# Altium PCB copper_suicide.PcbDoc (part 1 of 6)
Units mm, origin at the board's own origin, x right, y up, seen from the top; angles counter-clockwise.
Board outline 200 x 200 mm, 10 copper layers (Top Layer, Signal Layer 1, Signal Layer 2, Signal Layer 3, Signal Layer 4, Signal Layer 5, Signal Layer 6, Signal Layer 7, Signal Layer 8, Bottom Layer), stack 1.555 mm thick; 36 components, 3934 nets, 1640 pads, 0 vias.
Unrouted connection lines stored in the file: 671.
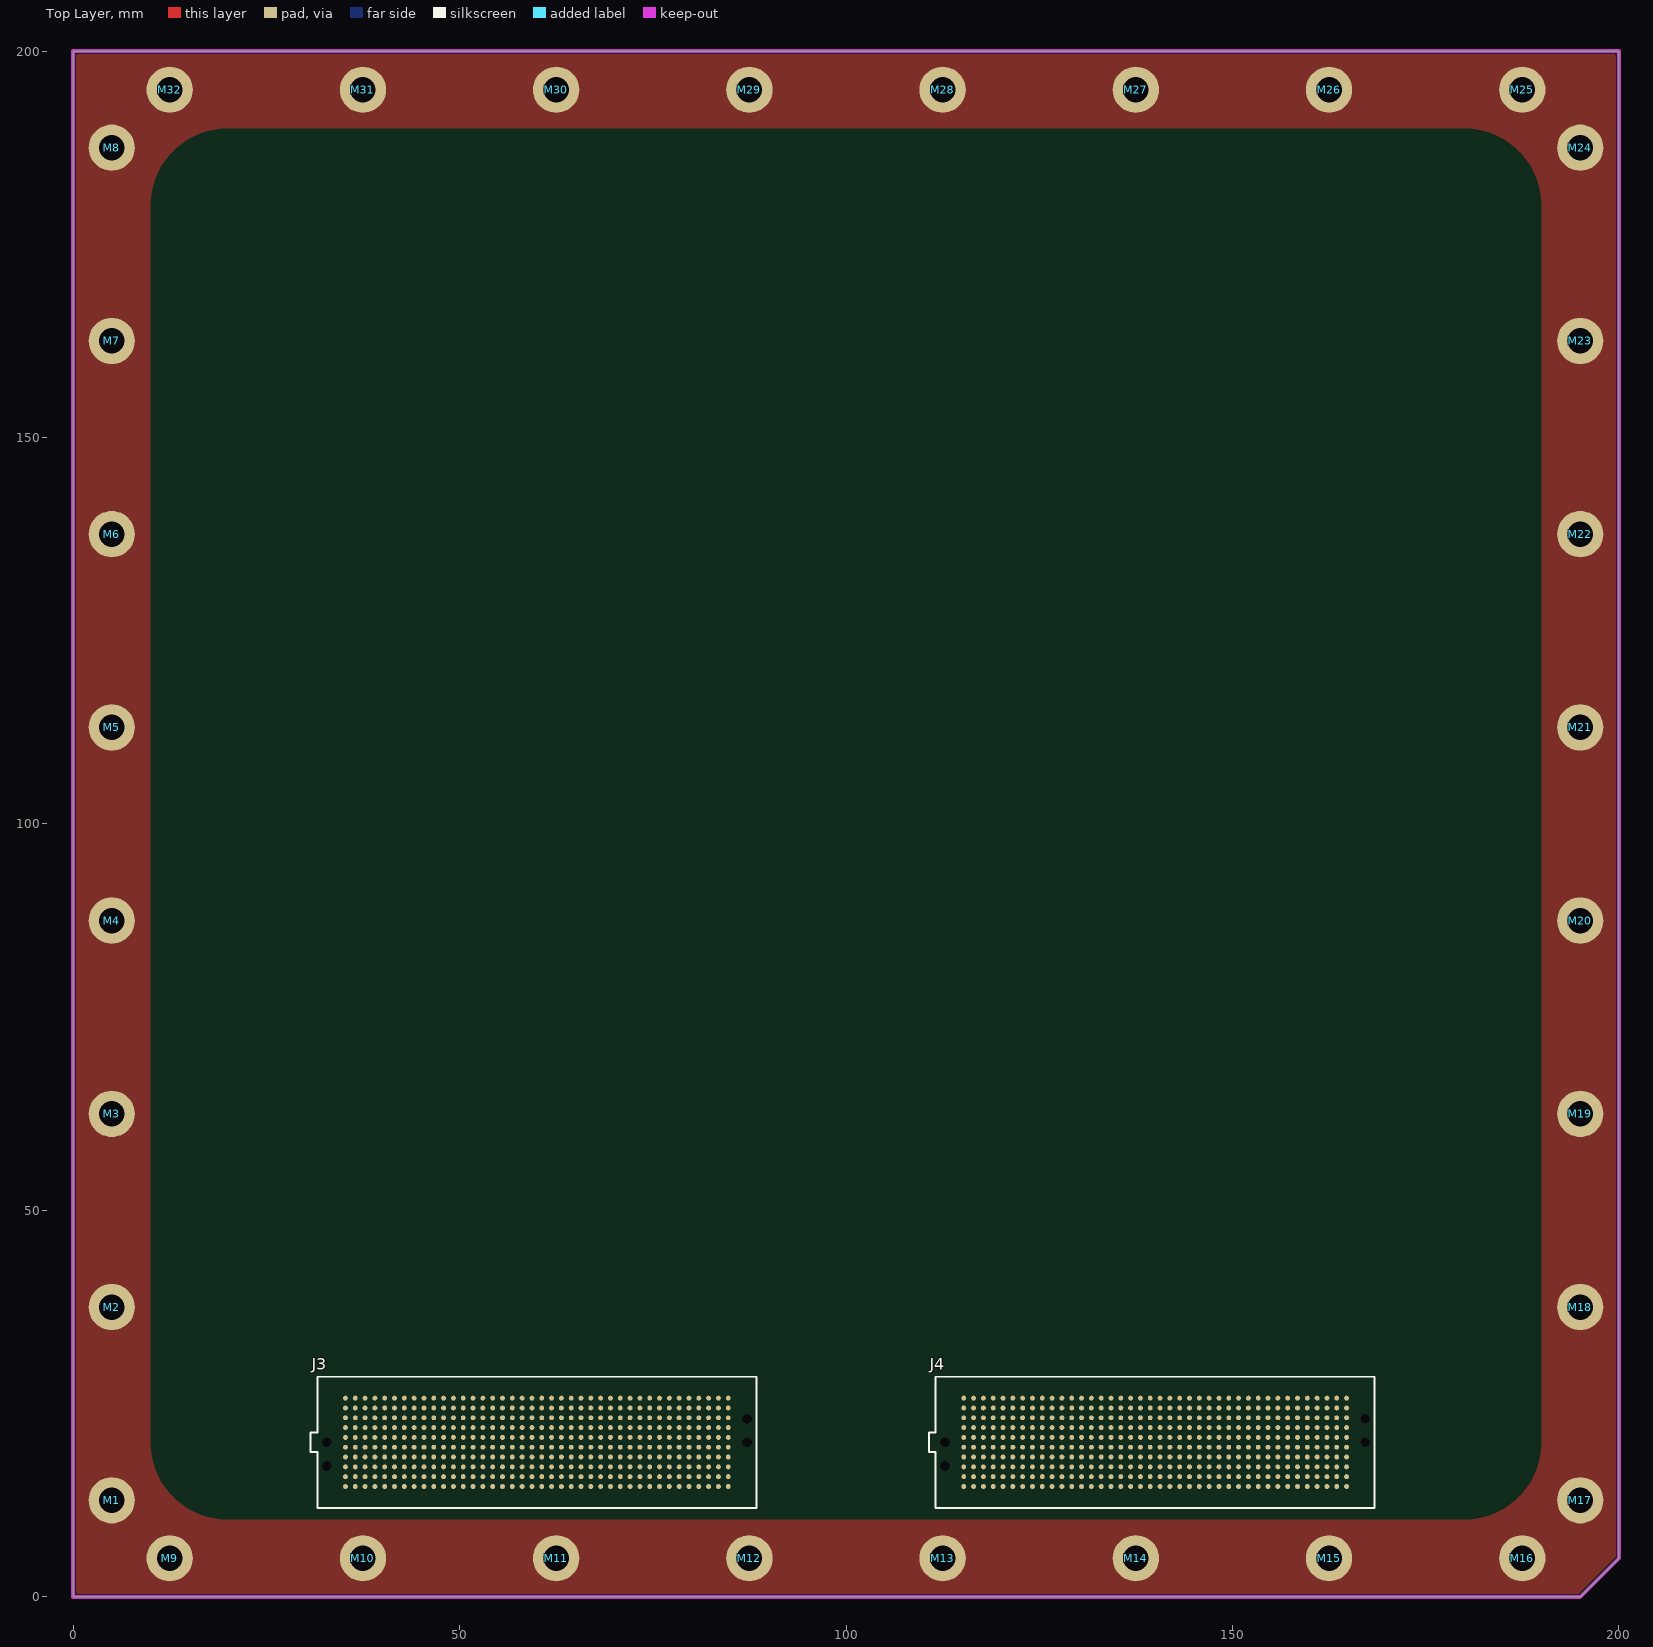
[diagram p0: Top Layer view]
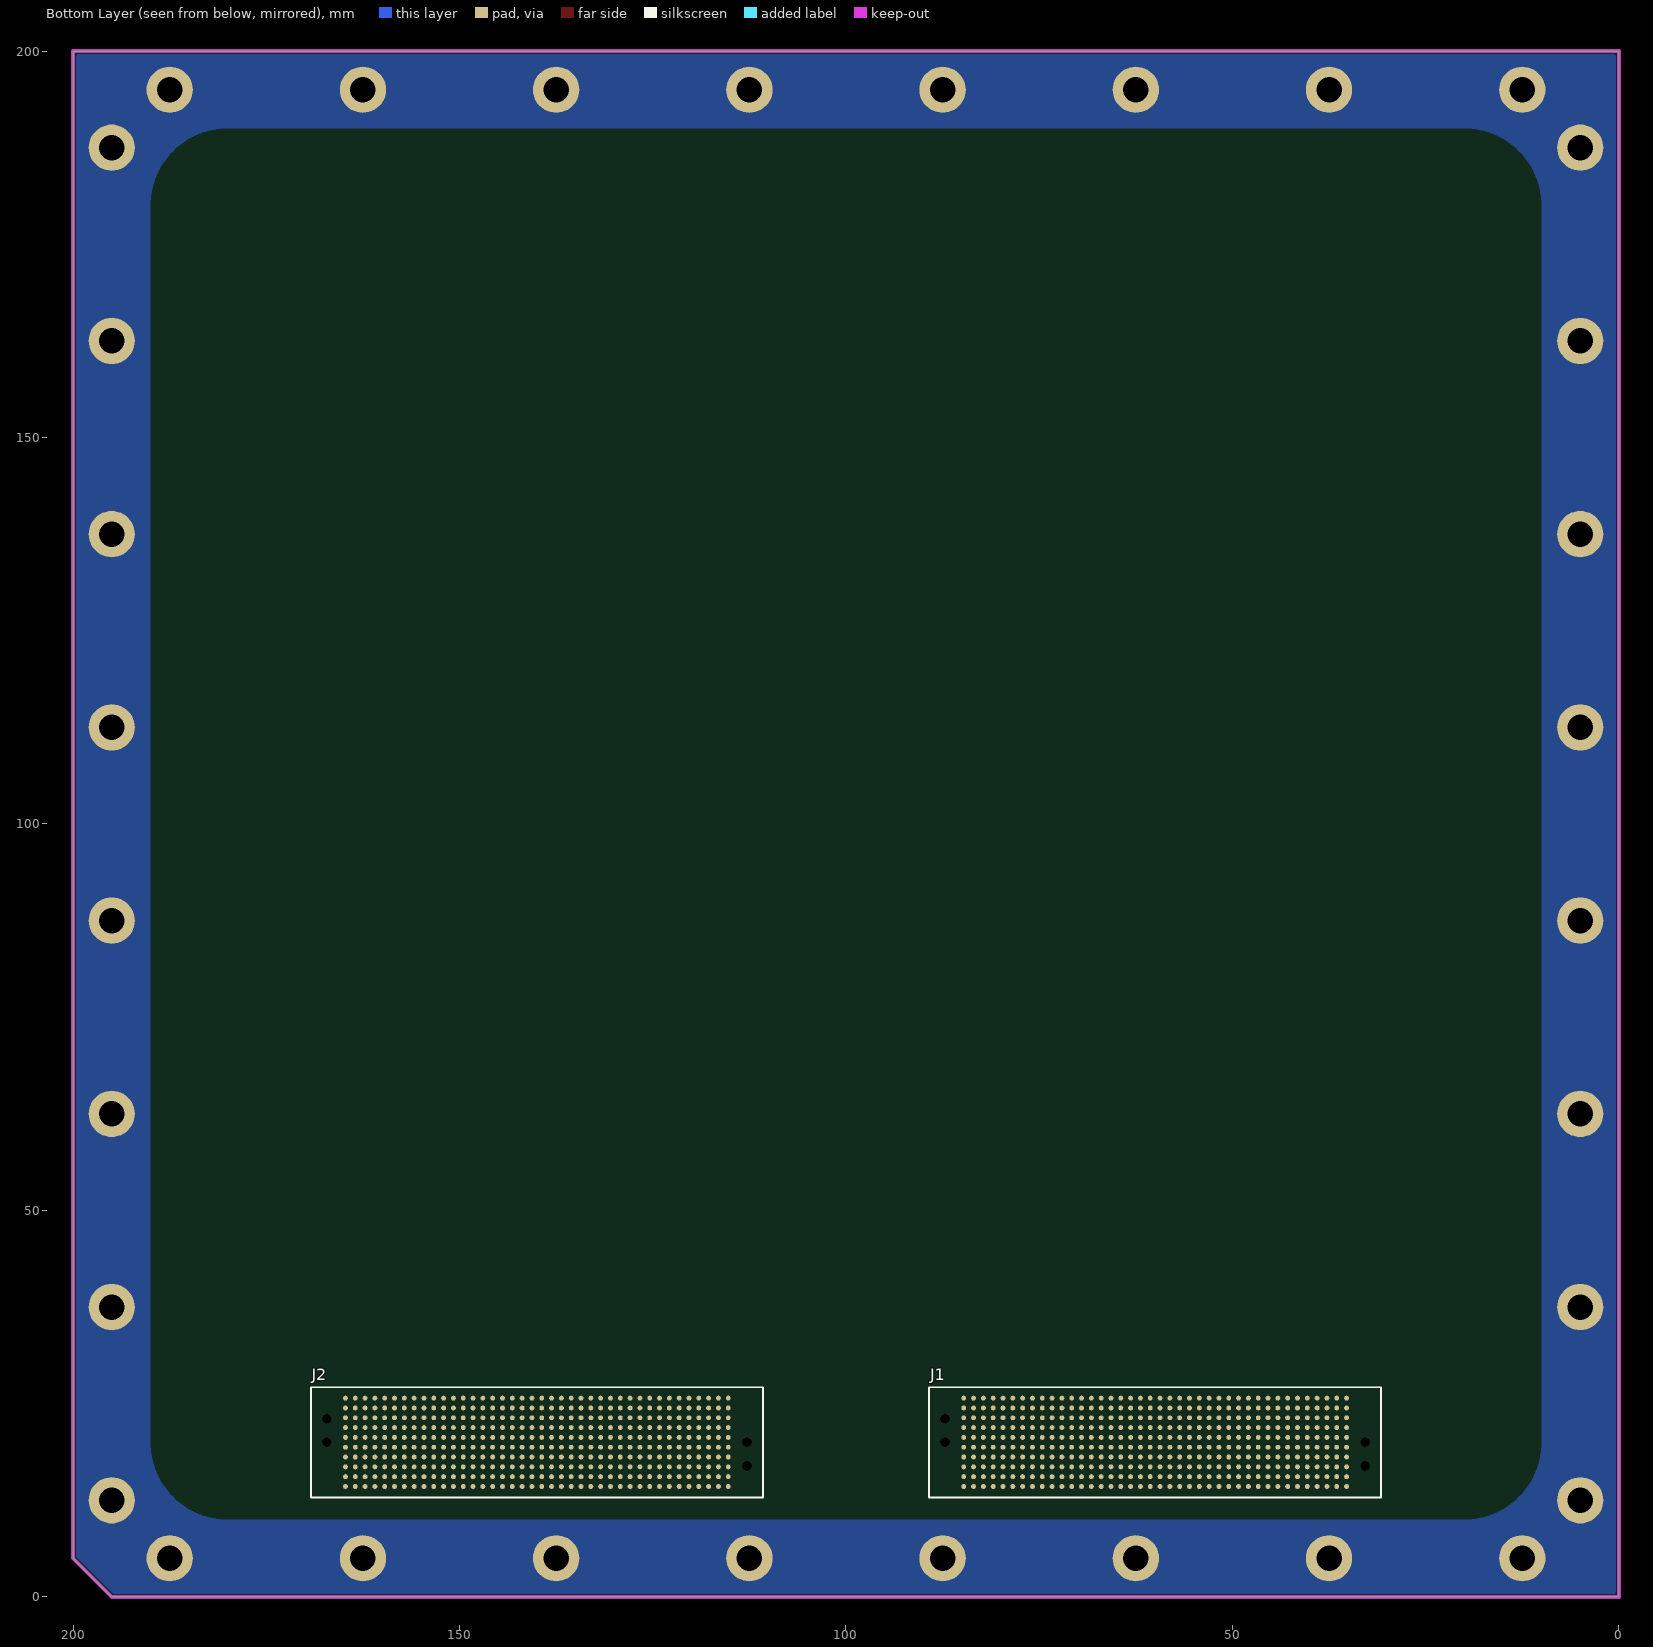
[diagram p1: Bottom Layer view, seen from below]

## Layer stack, top to bottom
Top Solder: solder mask 0.0102, Solder Resist, Dk 3.5
Top Layer: signal copper 0.036
Dielectric1: core 0.1448, FR408, Dk 3.67
Signal Layer 1: signal copper 0.018
Dielectric 3: prepreg 0.1448, FR408, Dk 3.67
Signal Layer 2: signal copper 0.018
Dielectric 4: core 0.1448, FR408, Dk 3.67
Signal Layer 3: signal copper 0.018
Dielectric 5: prepreg 0.1448, FR408, Dk 3.67
Signal Layer 4: signal copper 0.036
Dielectric 6: core 0.1448, FR408, Dk 3.67
Signal Layer 5: signal copper 0.036
Dielectric 7: prepreg 0.1448, FR408, Dk 3.67
Signal Layer 6: signal copper 0.018
Dielectric 8: core 0.1448, FR408, Dk 3.67
Signal Layer 7: signal copper 0.018
Dielectric 9: prepreg 0.1448, FR408, Dk 3.67
Signal Layer 8: signal copper 0.018
Dielectric 2: core 0.1448, FR408, Dk 3.67
Bottom Layer: signal copper 0.036
Bottom Solder: solder mask 0.0102, Solder Resist, Dk 3.5

## Board outline
0,0 195,0 200,5 200,200 0,200

## Design rules (kind name [scope] priority, off if disabled: settings)
Clearance [All] p1: gap=0.127
ComponentClearance [All] p1 off: gap=0.254 collisioncheckmode=3 verticalgap=0.254 showdistances=FALSE
DiffPairsRouting [All] p1: maxlimit=0.254 minlimit=0.254 mostfreqgap=0.254 toplayer_minwidth=0.381 toplayer_maxwidth=0.381 toplayer_prefwidth=0.381 midlayer1_minwidth=0.381 midlayer1_maxwidth=0.381 midlayer1_prefwidth=0.381 midlayer2_minwidth=0.381 midlayer2_maxwidth=0.381 midlayer2_prefwidth=0.381 midlayer3_minwidth=0.381 midlayer3_maxwidth=0.381 midlayer3_prefwidth=0.381 midlayer4_minwidth=0.381 midlayer4_maxwidth=0.381 midlayer4_prefwidth=0.381 midlayer5_minwidth=0.381 midlayer5_maxwidth=0.381 midlayer5_prefwidth=0.381 midlayer6_minwidth=0.381 midlayer6_maxwidth=0.381 midlayer6_prefwidth=0.381 midlayer7_minwidth=0.381 midlayer7_maxwidth=0.381 midlayer7_prefwidth=0.381 midlayer8_minwidth=0.381 midlayer8_maxwidth=0.381 midlayer8_prefwidth=0.381 bottomlayer_minwidth=0.381 bottomlayer_maxwidth=0.381 bottomlayer_prefwidth=0.381 maxuncoupledlength=12.7
HoleSize [All] p1: absolutevalues=TRUE maxlimit=25.4 minlimit=0.254 maxpercent=80.000 minpercent=20.000
Length "Schematic Length Constraint" [InNet('NetR14_1')] p1: maxlimit=50.8 minlimit=0
PolygonConnect [All] p1: connectstyle=Direct reliefconductorwidth=0.254 reliefentries=4 polygonreliefangle="90 Angle" airgapwidth=0.254
RoutingVias [All] p1: holewidth=0.711 width=1.27 viastyle="Through Hole" minholewidth=0.711 minwidth=1.27 maxholewidth=0.711 maxwidth=1.27
SilkToSolderMaskClearance SilkscreenOverComponentPads [IsPad] p1: minsilkscreentomaskgap=0.254 clearancetoexposedcopper=TRUE
SolderMaskExpansion [All] p1: expansion=0.102
Width [All] p1: maxlimit=500 minlimit=0.254 preferedwidth=0.254
26 further rules are at their usual default settings.

## Classes and differential pairs
net class JTAGI_TOP: JTAGI_TOP.TCK_5 JTAGI_TOP.TDI_5 JTAGI_TOP.TDO_5 JTAGI_TOP.TMS_5
net class CLKCFG: CLKCFG.C_5_N CLKCFG.C_5_P
component class PWR-VDDR: C85 C86 L4 U11
component class BD_JTAG: P16 P17 P18 P19
component class J4A: J4
component class J3A: J3
component class J2A: J2
component class J1A: J1
component class main: M1 M2 M3 M4 M5 M6 M7 M8 M9 M10 M11 M12 M13 M14 M15 M16 M17 M18 M19 M20 M21 M22 M23 M24 M25 M26 M27 M28 M29 M30 M31 M32
component class CLK: U1
component class FPGA00: P5A P6A P7A P8A
component class FPGA01: P5B P6B P7B P8B
component class FPGA02: P5C P6C P7C P8C
component class FPGA03: P5D P6D P7D P8D
component class FPGA10: P9A P10A P11A P12A
component class FPGA11: P9B P10B P11B P12B
component class FPGA12: P9C P10C P11C P12C
component class FPGA13: P9D P10D P11D P12D
component class FPGA20: P9E P10E P11E P12E
component class FPGA21: P9F P10F P11F P12F
component class FPGA22: P9G P10G P11G P12G
component class FPGA23: P9H P10H P11H P12H
component class FPGA30: P5E P6E P7E P8E
component class FPGA31: P5F P6F P7F P8F
component class FPGA32: P5G P6G P7G P8G
component class FPGA33: P5H P6H P7H P8H
net class A00: A00.CTRL.CASN_5 A00.CTRL.CKE_5 A00.CTRL.CLK_5_N A00.CTRL.CLK_5_P A00.CTRL.CSN_5 A00.CTRL.ODT_5 A00.CTRL.RASN_5 A00.CTRL.RSTN_5 A00.CTRL.WEN_5 A00.DA/B.A0_5 A00.DA/B.A1_5 A00.DA/B.A2_5 A00.DA/B.A3_5 A00.DA/B.A4_5 A00.DA/B.A5_5 A00.DA/B.A6_5 A00.DA/B.A7_5 A00.DA/B.A8_5 A00.DA/B.A9_5 A00.DA/B.A10_5 A00.DA/B.A11_5 A00.DA/B.A12_5 A00.DA/B.A13_5 A00.DA/B.A14_5 A00.DA/B.A15_5 A00.DA/B.B0_5 A00.DA/B.B1_5 A00.DA/B.B2_5
net class A01: A01.CTRL.CASN_5 A01.CTRL.CKE_5 A01.CTRL.CLK_5_N A01.CTRL.CLK_5_P A01.CTRL.CSN_5 A01.CTRL.ODT_5 A01.CTRL.RASN_5 A01.CTRL.RSTN_5 A01.CTRL.WEN_5 A01.DA/B.A0_5 A01.DA/B.A1_5 A01.DA/B.A2_5 A01.DA/B.A3_5 A01.DA/B.A4_5 A01.DA/B.A5_5 A01.DA/B.A6_5 A01.DA/B.A7_5 A01.DA/B.A8_5 A01.DA/B.A9_5 A01.DA/B.A10_5 A01.DA/B.A11_5 A01.DA/B.A12_5 A01.DA/B.A13_5 A01.DA/B.A14_5 A01.DA/B.A15_5 A01.DA/B.B0_5 A01.DA/B.B1_5 A01.DA/B.B2_5
net class A02: A02.CTRL.CASN_5 A02.CTRL.CKE_5 A02.CTRL.CLK_5_N A02.CTRL.CLK_5_P A02.CTRL.CSN_5 A02.CTRL.ODT_5 A02.CTRL.RASN_5 A02.CTRL.RSTN_5 A02.CTRL.WEN_5 A02.DA/B.A0_5 A02.DA/B.A1_5 A02.DA/B.A2_5 A02.DA/B.A3_5 A02.DA/B.A4_5 A02.DA/B.A5_5 A02.DA/B.A6_5 A02.DA/B.A7_5 A02.DA/B.A8_5 A02.DA/B.A9_5 A02.DA/B.A10_5 A02.DA/B.A11_5 A02.DA/B.A12_5 A02.DA/B.A13_5 A02.DA/B.A14_5 A02.DA/B.A15_5 A02.DA/B.B0_5 A02.DA/B.B1_5 A02.DA/B.B2_5
net class A03: A03.CTRL.CASN_5 A03.CTRL.CKE_5 A03.CTRL.CLK_5_N A03.CTRL.CLK_5_P A03.CTRL.CSN_5 A03.CTRL.ODT_5 A03.CTRL.RASN_5 A03.CTRL.RSTN_5 A03.CTRL.WEN_5 A03.DA/B.A0_5 A03.DA/B.A1_5 A03.DA/B.A2_5 A03.DA/B.A3_5 A03.DA/B.A4_5 A03.DA/B.A5_5 A03.DA/B.A6_5 A03.DA/B.A7_5 A03.DA/B.A8_5 A03.DA/B.A9_5 A03.DA/B.A10_5 A03.DA/B.A11_5 A03.DA/B.A12_5 A03.DA/B.A13_5 A03.DA/B.A14_5 A03.DA/B.A15_5 A03.DA/B.B0_5 A03.DA/B.B1_5 A03.DA/B.B2_5
net class A30: A30.CTRL.CASN_5 A30.CTRL.CKE_5 A30.CTRL.CLK_5_N A30.CTRL.CLK_5_P A30.CTRL.CSN_5 A30.CTRL.ODT_5 A30.CTRL.RASN_5 A30.CTRL.RSTN_5 A30.CTRL.WEN_5 A30.DA/B.A0_5 A30.DA/B.A1_5 A30.DA/B.A2_5 A30.DA/B.A3_5 A30.DA/B.A4_5 A30.DA/B.A5_5 A30.DA/B.A6_5 A30.DA/B.A7_5 A30.DA/B.A8_5 A30.DA/B.A9_5 A30.DA/B.A10_5 A30.DA/B.A11_5 A30.DA/B.A12_5 A30.DA/B.A13_5 A30.DA/B.A14_5 A30.DA/B.A15_5 A30.DA/B.B0_5 A30.DA/B.B1_5 A30.DA/B.B2_5
net class A31: A31.CTRL.CASN_5 A31.CTRL.CKE_5 A31.CTRL.CLK_5_N A31.CTRL.CLK_5_P A31.CTRL.CSN_5 A31.CTRL.ODT_5 A31.CTRL.RASN_5 A31.CTRL.RSTN_5 A31.CTRL.WEN_5 A31.DA/B.A0_5 A31.DA/B.A1_5 A31.DA/B.A2_5 A31.DA/B.A3_5 A31.DA/B.A4_5 A31.DA/B.A5_5 A31.DA/B.A6_5 A31.DA/B.A7_5 A31.DA/B.A8_5 A31.DA/B.A9_5 A31.DA/B.A10_5 A31.DA/B.A11_5 A31.DA/B.A12_5 A31.DA/B.A13_5 A31.DA/B.A14_5 A31.DA/B.A15_5 A31.DA/B.B0_5 A31.DA/B.B1_5 A31.DA/B.B2_5
net class A32: A32.CTRL.CASN_5 A32.CTRL.CKE_5 A32.CTRL.CLK_5_N A32.CTRL.CLK_5_P A32.CTRL.CSN_5 A32.CTRL.ODT_5 A32.CTRL.RASN_5 A32.CTRL.RSTN_5 A32.CTRL.WEN_5 A32.DA/B.A0_5 A32.DA/B.A1_5 A32.DA/B.A2_5 A32.DA/B.A3_5 A32.DA/B.A4_5 A32.DA/B.A5_5 A32.DA/B.A6_5 A32.DA/B.A7_5 A32.DA/B.A8_5 A32.DA/B.A9_5 A32.DA/B.A10_5 A32.DA/B.A11_5 A32.DA/B.A12_5 A32.DA/B.A13_5 A32.DA/B.A14_5 A32.DA/B.A15_5 A32.DA/B.B0_5 A32.DA/B.B1_5 A32.DA/B.B2_5
net class A33: A33.CTRL.CASN_5 A33.CTRL.CKE_5 A33.CTRL.CLK_5_N A33.CTRL.CLK_5_P A33.CTRL.CSN_5 A33.CTRL.ODT_5 A33.CTRL.RASN_5 A33.CTRL.RSTN_5 A33.CTRL.WEN_5 A33.DA/B.A0_5 A33.DA/B.A1_5 A33.DA/B.A2_5 A33.DA/B.A3_5 A33.DA/B.A4_5 A33.DA/B.A5_5 A33.DA/B.A6_5 A33.DA/B.A7_5 A33.DA/B.A8_5 A33.DA/B.A9_5 A33.DA/B.A10_5 A33.DA/B.A11_5 A33.DA/B.A12_5 A33.DA/B.A13_5 A33.DA/B.A14_5 A33.DA/B.A15_5 A33.DA/B.B0_5 A33.DA/B.B1_5 A33.DA/B.B2_5
net class CFG00: CFG00.CCLK_5 CFG00.DIN_5 CFG00.DONE_5 CFG00.DOUT_5 CFG00.INITN_5 CFG00.PROGN_5
net class CFG01: CFG01.CCLK_5 CFG01.DIN_5 CFG01.DONE_5 CFG01.DOUT_5 CFG01.INITN_5 CFG01.PROGN_5
net class CFG02: CFG02.CCLK_5 CFG02.DIN_5 CFG02.DONE_5 CFG02.DOUT_5 CFG02.INITN_5 CFG02.PROGN_5
net class CFG03: CFG03.CCLK_5 CFG03.DIN_5 CFG03.DONE_5 CFG03.DOUT_5 CFG03.INITN_5 CFG03.PROGN_5
net class CFG10: CFG10.CCLK_5 CFG10.DIN_5 CFG10.DONE_5 CFG10.DOUT_5 CFG10.INITN_5 CFG10.PROGN_5
net class CFG11: CFG11.CCLK_5 CFG11.DIN_5 CFG11.DONE_5 CFG11.DOUT_5 CFG11.INITN_5 CFG11.PROGN_5
net class CFG12: CFG12.CCLK_5 CFG12.DIN_5 CFG12.DONE_5 CFG12.DOUT_5 CFG12.INITN_5 CFG12.PROGN_5
net class CFG13: CFG13.CCLK_5 CFG13.DIN_5 CFG13.DONE_5 CFG13.DOUT_5 CFG13.INITN_5 CFG13.PROGN_5
net class CFG20: CFG20.CCLK_5 CFG20.DIN_5 CFG20.DONE_5 CFG20.DOUT_5 CFG20.INITN_5 CFG20.PROGN_5
net class CFG21: CFG21.CCLK_5 CFG21.DIN_5 CFG21.DONE_5 CFG21.DOUT_5 CFG21.INITN_5 CFG21.PROGN_5
net class CFG22: CFG22.CCLK_5 CFG22.DIN_5 CFG22.DONE_5 CFG22.DOUT_5 CFG22.INITN_5 CFG22.PROGN_5
net class CFG23: CFG23.CCLK_5 CFG23.DIN_5 CFG23.DONE_5 CFG23.DOUT_5 CFG23.INITN_5 CFG23.PROGN_5
net class CFG30: CFG30.CCLK_5 CFG30.DIN_5 CFG30.DONE_5 CFG30.DOUT_5 CFG30.INITN_5 CFG30.PROGN_5
net class CFG31: CFG31.CCLK_5 CFG31.DIN_5 CFG31.DONE_5 CFG31.DOUT_5 CFG31.INITN_5 CFG31.PROGN_5
net class CFG32: CFG32.CCLK_5 CFG32.DIN_5 CFG32.DONE_5 CFG32.DOUT_5 CFG32.INITN_5 CFG32.PROGN_5
net class CFG33: CFG33.CCLK_5 CFG33.DIN_5 CFG33.DONE_5 CFG33.DOUT_5 CFG33.INITN_5 CFG33.PROGN_5
net class CLK00: CLK00.C_5_N CLK00.C_5_P
net class CLK01: CLK01.C_5_N CLK01.C_5_P
net class CLK02: CLK02.C_5_N CLK02.C_5_P
net class CLK03: CLK03.C_5_N CLK03.C_5_P
net class CLK10: CLK10.C_5_N CLK10.C_5_P
net class CLK11: CLK11.C_5_N CLK11.C_5_P
net class CLK12: CLK12.C_5_N CLK12.C_5_P
net class CLK13: CLK13.C_5_N CLK13.C_5_P
net class CLK20: CLK20.C_5_N CLK20.C_5_P
net class CLK21: CLK21.C_5_N CLK21.C_5_P
net class CLK22: CLK22.C_5_N CLK22.C_5_P
net class CLK23: CLK23.C_5_N CLK23.C_5_P
net class CLK30: CLK30.C_5_N CLK30.C_5_P
net class CLK31: CLK31.C_5_N CLK31.C_5_P
net class CLK32: CLK32.C_5_N CLK32.C_5_P
net class CLK33: CLK33.C_5_N CLK33.C_5_P
net class F00_DDR3_AC: A00.CTRL.CASN_5 A00.CTRL.CKE_5 A00.CTRL.CLK_5_N A00.CTRL.CLK_5_P A00.CTRL.CSN_5 A00.CTRL.ODT_5 A00.CTRL.RASN_5 A00.CTRL.WEN_5 A00.DA/B.A0_5 A00.DA/B.A1_5 A00.DA/B.A2_5 A00.DA/B.A3_5 A00.DA/B.A4_5 A00.DA/B.A5_5 A00.DA/B.A6_5 A00.DA/B.A7_5 A00.DA/B.A8_5 A00.DA/B.A9_5 A00.DA/B.A10_5 A00.DA/B.A11_5 A00.DA/B.A12_5 A00.DA/B.A13_5 A00.DA/B.A14_5 A00.DA/B.A15_5 A00.DA/B.B0_5 A00.DA/B.B1_5 A00.DA/B.B2_5 A01.CTRL.CASN_5 A01.CTRL.CKE_5 A01.CTRL.CLK_5_N A01.CTRL.CLK_5_P A01.CTRL.CSN_5 A01.CTRL.ODT_5 A01.CTRL.RASN_5 A01.CTRL.WEN_5 A01.DA/B.A0_5 A01.DA/B.A1_5 A01.DA/B.A2_5 A01.DA/B.A3_5 A01.DA/B.A4_5 A01.DA/B.A5_5 A01.DA/B.A6_5 A01.DA/B.A7_5 A01.DA/B.A8_5 A01.DA/B.A9_5 A01.DA/B.A10_5 A01.DA/B.A11_5 A01.DA/B.A12_5 A01.DA/B.A13_5 A01.DA/B.A14_5 A01.DA/B.A15_5 A01.DA/B.B0_5 A01.DA/B.B1_5 A01.DA/B.B2_5 A02.CTRL.CASN_5 A02.CTRL.CKE_5 A02.CTRL.CLK_5_N A02.CTRL.CLK_5_P A02.CTRL.CSN_5 A02.CTRL.ODT_5 A02.CTRL.RASN_5 A02.CTRL.WEN_5 A02.DA/B.A0_5 A02.DA/B.A1_5 A02.DA/B.A2_5 A02.DA/B.A3_5 A02.DA/B.A4_5 A02.DA/B.A5_5 A02.DA/B.A6_5 A02.DA/B.A7_5 A02.DA/B.A8_5 A02.DA/B.A9_5 A02.DA/B.A10_5 A02.DA/B.A11_5 A02.DA/B.A12_5 A02.DA/B.A13_5 A02.DA/B.A14_5 A02.DA/B.A15_5 A02.DA/B.B0_5 A02.DA/B.B1_5 A02.DA/B.B2_5 A03.CTRL.CASN_5 A03.CTRL.CKE_5 A03.CTRL.CLK_5_N A03.CTRL.CLK_5_P A03.CTRL.CSN_5 A03.CTRL.ODT_5 A03.CTRL.RASN_5 A03.CTRL.WEN_5 A03.DA/B.A0_5 A03.DA/B.A1_5 A03.DA/B.A2_5 A03.DA/B.A3_5 A03.DA/B.A4_5 A03.DA/B.A5_5 A03.DA/B.A6_5 A03.DA/B.A7_5 A03.DA/B.A8_5 A03.DA/B.A9_5 A03.DA/B.A10_5 A03.DA/B.A11_5 A03.DA/B.A12_5 A03.DA/B.A13_5 A03.DA/B.A14_5 A03.DA/B.A15_5 A03.DA/B.B0_5 A03.DA/B.B1_5 A03.DA/B.B2_5 A30.CTRL.CASN_5 A30.CTRL.CKE_5 A30.CTRL.CLK_5_N A30.CTRL.CLK_5_P A30.CTRL.CSN_5 A30.CTRL.ODT_5 A30.CTRL.RASN_5 A30.CTRL.WEN_5 A30.DA/B.A0_5 A30.DA/B.A1_5 A30.DA/B.A2_5 A30.DA/B.A3_5 A30.DA/B.A4_5 A30.DA/B.A5_5 A30.DA/B.A6_5 A30.DA/B.A7_5 A30.DA/B.A8_5 A30.DA/B.A9_5 A30.DA/B.A10_5 A30.DA/B.A11_5 A30.DA/B.A12_5 A30.DA/B.A13_5 A30.DA/B.A14_5 A30.DA/B.A15_5 A30.DA/B.B0_5 A30.DA/B.B1_5 A30.DA/B.B2_5 A31.CTRL.CASN_5 A31.CTRL.CKE_5 A31.CTRL.CLK_5_N A31.CTRL.CLK_5_P A31.CTRL.CSN_5 A31.CTRL.ODT_5 A31.CTRL.RASN_5 A31.CTRL.WEN_5 A31.DA/B.A0_5 A31.DA/B.A1_5 A31.DA/B.A2_5 A31.DA/B.A3_5 A31.DA/B.A4_5 A31.DA/B.A5_5 A31.DA/B.A6_5 A31.DA/B.A7_5 A31.DA/B.A8_5 A31.DA/B.A9_5 A31.DA/B.A10_5 A31.DA/B.A11_5 A31.DA/B.A12_5 A31.DA/B.A13_5 A31.DA/B.A14_5 A31.DA/B.A15_5 A31.DA/B.B0_5 A31.DA/B.B1_5 A31.DA/B.B2_5 A32.CTRL.CASN_5 A32.CTRL.CKE_5 A32.CTRL.CLK_5_N A32.CTRL.CLK_5_P A32.CTRL.CSN_5 A32.CTRL.ODT_5 A32.CTRL.RASN_5 A32.CTRL.WEN_5 A32.DA/B.A0_5 A32.DA/B.A1_5 A32.DA/B.A2_5 A32.DA/B.A3_5 A32.DA/B.A4_5 A32.DA/B.A5_5 A32.DA/B.A6_5 A32.DA/B.A7_5 A32.DA/B.A8_5 A32.DA/B.A9_5 A32.DA/B.A10_5 A32.DA/B.A11_5 A32.DA/B.A12_5 A32.DA/B.A13_5 A32.DA/B.A14_5 A32.DA/B.A15_5 A32.DA/B.B0_5 A32.DA/B.B1_5 A32.DA/B.B2_5 A33.CTRL.CASN_5 A33.CTRL.CKE_5 A33.CTRL.CLK_5_N A33.CTRL.CLK_5_P A33.CTRL.CSN_5 A33.CTRL.ODT_5 A33.CTRL.RASN_5 A33.CTRL.WEN_5 A33.DA/B.A0_5 A33.DA/B.A1_5 A33.DA/B.A2_5 A33.DA/B.A3_5 A33.DA/B.A4_5 A33.DA/B.A5_5 A33.DA/B.A6_5 A33.DA/B.A7_5 A33.DA/B.A8_5 A33.DA/B.A9_5 A33.DA/B.A10_5 A33.DA/B.A11_5 A33.DA/B.A12_5 A33.DA/B.A13_5 A33.DA/B.A14_5 A33.DA/B.A15_5 A33.DA/B.B0_5 A33.DA/B.B1_5 A33.DA/B.B2_5
net class F00_DDR3_CLK: A00.CTRL.CLK_5_N A00.CTRL.CLK_5_P A01.CTRL.CLK_5_N A01.CTRL.CLK_5_P A02.CTRL.CLK_5_N A02.CTRL.CLK_5_P A03.CTRL.CLK_5_N A03.CTRL.CLK_5_P A30.CTRL.CLK_5_N A30.CTRL.CLK_5_P A31.CTRL.CLK_5_N A31.CTRL.CLK_5_P A32.CTRL.CLK_5_N A32.CTRL.CLK_5_P A33.CTRL.CLK_5_N A33.CTRL.CLK_5_P
net class F00_DDR3_DQ0: L00.D0_5 L00.D1_5 L00.D2_5 L00.D3_5 L00.D4_5 L00.D5_5 L00.D6_5 L00.D7_5 L00.LDM_5 L01.D0_5 L01.D1_5 L01.D2_5 L01.D3_5 L01.D4_5 L01.D5_5 L01.D6_5 L01.D7_5 L01.LDM_5 L02.D0_5 L02.D1_5 L02.D2_5 L02.D3_5 L02.D4_5 L02.D5_5 L02.D6_5 L02.D7_5 L02.LDM_5 L03.D0_5 L03.D1_5 L03.D2_5 L03.D3_5 L03.D4_5 L03.D5_5 L03.D6_5 L03.D7_5 L03.LDM_5 L30.D0_5 L30.D1_5 L30.D2_5 L30.D3_5 L30.D4_5 L30.D5_5 L30.D6_5 L30.D7_5 L30.LDM_5 L31.D0_5 L31.D1_5 L31.D2_5 L31.D3_5 L31.D4_5 L31.D5_5 L31.D6_5 L31.D7_5 L31.LDM_5 L32.D0_5 L32.D1_5 L32.D2_5 L32.D3_5 L32.D4_5 L32.D5_5 L32.D6_5 L32.D7_5 L32.LDM_5 L33.D0_5 L33.D1_5 L33.D2_5 L33.D3_5 L33.D4_5 L33.D5_5 L33.D6_5 L33.D7_5 L33.LDM_5
net class F00_DDR3_DQ1: L00.D8_5 L00.D9_5 L00.D10_5 L00.D11_5 L00.D12_5 L00.D13_5 L00.D14_5 L00.D15_5 L00.UDM_5 L01.D8_5 L01.D9_5 L01.D10_5 L01.D11_5 L01.D12_5 L01.D13_5 L01.D14_5 L01.D15_5 L01.UDM_5 L02.D8_5 L02.D9_5 L02.D10_5 L02.D11_5 L02.D12_5 L02.D13_5 L02.D14_5 L02.D15_5 L02.UDM_5 L03.D8_5 L03.D9_5 L03.D10_5 L03.D11_5 L03.D12_5 L03.D13_5 L03.D14_5 L03.D15_5 L03.UDM_5 L30.D8_5 L30.D9_5 L30.D10_5 L30.D11_5 L30.D12_5 L30.D13_5 L30.D14_5 L30.D15_5 L30.UDM_5 L31.D8_5 L31.D9_5 L31.D10_5 L31.D11_5 L31.D12_5 L31.D13_5 L31.D14_5 L31.D15_5 L31.UDM_5 L32.D8_5 L32.D9_5 L32.D10_5 L32.D11_5 L32.D12_5 L32.D13_5 L32.D14_5 L32.D15_5 L32.UDM_5 L33.D8_5 L33.D9_5 L33.D10_5 L33.D11_5 L33.D12_5 L33.D13_5 L33.D14_5 L33.D15_5 L33.UDM_5
net class F00_DDR3_DQ2: U00.D0_5 U00.D1_5 U00.D2_5 U00.D3_5 U00.D4_5 U00.D5_5 U00.D6_5 U00.D7_5 U00.LDM_5 U01.D0_5 U01.D1_5 U01.D2_5 U01.D3_5 U01.D4_5 U01.D5_5 U01.D6_5 U01.D7_5 U01.LDM_5 U02.D0_5 U02.D1_5 U02.D2_5 U02.D3_5 U02.D4_5 U02.D5_5 U02.D6_5 U02.D7_5 U02.LDM_5 U03.D0_5 U03.D1_5 U03.D2_5 U03.D3_5 U03.D4_5 U03.D5_5 U03.D6_5 U03.D7_5 U03.LDM_5 U30.D0_5 U30.D1_5 U30.D2_5 U30.D3_5 U30.D4_5 U30.D5_5 U30.D6_5 U30.D7_5 U30.LDM_5 U31.D0_5 U31.D1_5 U31.D2_5 U31.D3_5 U31.D4_5 U31.D5_5 U31.D6_5 U31.D7_5 U31.LDM_5 U32.D0_5 U32.D1_5 U32.D2_5 U32.D3_5 U32.D4_5 U32.D5_5 U32.D6_5 U32.D7_5 U32.LDM_5 U33.D0_5 U33.D1_5 U33.D2_5 U33.D3_5 U33.D4_5 U33.D5_5 U33.D6_5 U33.D7_5 U33.LDM_5
net class F00_DDR3_DQ3: U00.D8_5 U00.D9_5 U00.D10_5 U00.D11_5 U00.D12_5 U00.D13_5 U00.D14_5 U00.D15_5 U00.UDM_5 U01.D8_5 U01.D9_5 U01.D10_5 U01.D11_5 U01.D12_5 U01.D13_5 U01.D14_5 U01.D15_5 U01.UDM_5 U02.D8_5 U02.D9_5 U02.D10_5 U02.D11_5 U02.D12_5 U02.D13_5 U02.D14_5 U02.D15_5 U02.UDM_5 U03.D8_5 U03.D9_5 U03.D10_5 U03.D11_5 U03.D12_5 U03.D13_5 U03.D14_5 U03.D15_5 U03.UDM_5 U30.D8_5 U30.D9_5 U30.D10_5 U30.D11_5 U30.D12_5 U30.D13_5 U30.D14_5 U30.D15_5 U30.UDM_5 U31.D8_5 U31.D9_5 U31.D10_5 U31.D11_5 U31.D12_5 U31.D13_5 U31.D14_5 U31.D15_5 U31.UDM_5 U32.D8_5 U32.D9_5 U32.D10_5 U32.D11_5 U32.D12_5 U32.D13_5 U32.D14_5 U32.D15_5 U32.UDM_5 U33.D8_5 U33.D9_5 U33.D10_5 U33.D11_5 U33.D12_5 U33.D13_5 U33.D14_5 U33.D15_5 U33.UDM_5
net class F00_DDR3_DQS0: L00.D0_5 L00.D1_5 L00.D2_5 L00.D3_5 L00.D4_5 L00.D5_5 L00.D6_5 L00.D7_5 L00.L_5_N L00.L_5_P L00.LDM_5 L01.D0_5 L01.D1_5 L01.D2_5 L01.D3_5 L01.D4_5 L01.D5_5 L01.D6_5 L01.D7_5 L01.L_5_N L01.L_5_P L01.LDM_5 L02.D0_5 L02.D1_5 L02.D2_5 L02.D3_5 L02.D4_5 L02.D5_5 L02.D6_5 L02.D7_5 L02.L_5_N L02.L_5_P L02.LDM_5 L03.D0_5 L03.D1_5 L03.D2_5 L03.D3_5 L03.D4_5 L03.D5_5 L03.D6_5 L03.D7_5 L03.L_5_N L03.L_5_P L03.LDM_5 L30.D0_5 L30.D1_5 L30.D2_5 L30.D3_5 L30.D4_5 L30.D5_5 L30.D6_5 L30.D7_5 L30.L_5_N L30.L_5_P L30.LDM_5 L31.D0_5 L31.D1_5 L31.D2_5 L31.D3_5 L31.D4_5 L31.D5_5 L31.D6_5 L31.D7_5 L31.L_5_N L31.L_5_P L31.LDM_5 L32.D0_5 L32.D1_5 L32.D2_5 L32.D3_5 L32.D4_5 L32.D5_5 L32.D6_5 L32.D7_5 L32.L_5_N L32.L_5_P L32.LDM_5 L33.D0_5 L33.D1_5 L33.D2_5 L33.D3_5 L33.D4_5 L33.D5_5 L33.D6_5 L33.D7_5 L33.L_5_N L33.L_5_P L33.LDM_5
net class F00_DDR3_DQS1: L00.D8_5 L00.D9_5 L00.D10_5 L00.D11_5 L00.D12_5 L00.D13_5 L00.D14_5 L00.D15_5 L00.U_5_N L00.U_5_P L00.UDM_5 L01.D8_5 L01.D9_5 L01.D10_5 L01.D11_5 L01.D12_5 L01.D13_5 L01.D14_5 L01.D15_5 L01.U_5_N L01.U_5_P L01.UDM_5 L02.D8_5 L02.D9_5 L02.D10_5 L02.D11_5 L02.D12_5 L02.D13_5 L02.D14_5 L02.D15_5 L02.U_5_N L02.U_5_P L02.UDM_5 L03.D8_5 L03.D9_5 L03.D10_5 L03.D11_5 L03.D12_5 L03.D13_5 L03.D14_5 L03.D15_5 L03.U_5_N L03.U_5_P L03.UDM_5 L30.D8_5 L30.D9_5 L30.D10_5 L30.D11_5 L30.D12_5 L30.D13_5 L30.D14_5 L30.D15_5 L30.U_5_N L30.U_5_P L30.UDM_5 L31.D8_5 L31.D9_5 L31.D10_5 L31.D11_5 L31.D12_5 L31.D13_5 L31.D14_5 L31.D15_5 L31.U_5_N L31.U_5_P L31.UDM_5 L32.D8_5 L32.D9_5 L32.D10_5 L32.D11_5 L32.D12_5 L32.D13_5 L32.D14_5 L32.D15_5 L32.U_5_N L32.U_5_P L32.UDM_5 L33.D8_5 L33.D9_5 L33.D10_5 L33.D11_5 L33.D12_5 L33.D13_5 L33.D14_5 L33.D15_5 L33.U_5_N L33.U_5_P L33.UDM_5
net class F00_DDR3_DQS2: U00.D0_5 U00.D1_5 U00.D2_5 U00.D3_5 U00.D4_5 U00.D5_5 U00.D6_5 U00.D7_5 U00.L_5_N U00.L_5_P U00.LDM_5 U01.D0_5 U01.D1_5 U01.D2_5 U01.D3_5 U01.D4_5 U01.D5_5 U01.D6_5 U01.D7_5 U01.L_5_N U01.L_5_P U01.LDM_5 U02.D0_5 U02.D1_5 U02.D2_5 U02.D3_5 U02.D4_5 U02.D5_5 U02.D6_5 U02.D7_5 U02.L_5_N U02.L_5_P U02.LDM_5 U03.D0_5 U03.D1_5 U03.D2_5 U03.D3_5 U03.D4_5 U03.D5_5 U03.D6_5 U03.D7_5 U03.L_5_N U03.L_5_P U03.LDM_5 U30.D0_5 U30.D1_5 U30.D2_5 U30.D3_5 U30.D4_5 U30.D5_5 U30.D6_5 U30.D7_5 U30.L_5_N U30.L_5_P U30.LDM_5 U31.D0_5 U31.D1_5 U31.D2_5 U31.D3_5 U31.D4_5 U31.D5_5 U31.D6_5 U31.D7_5 U31.L_5_N U31.L_5_P U31.LDM_5 U32.D0_5 U32.D1_5 U32.D2_5 U32.D3_5 U32.D4_5 U32.D5_5 U32.D6_5 U32.D7_5 U32.L_5_N U32.L_5_P U32.LDM_5 U33.D0_5 U33.D1_5 U33.D2_5 U33.D3_5 U33.D4_5 U33.D5_5 U33.D6_5 U33.D7_5 U33.L_5_N U33.L_5_P U33.LDM_5
net class F00_DDR3_DQS3: U00.D8_5 U00.D9_5 U00.D10_5 U00.D11_5 U00.D12_5 U00.D13_5 U00.D14_5 U00.D15_5 U00.U_5_N U00.U_5_P U00.UDM_5 U01.D8_5 U01.D9_5 U01.D10_5 U01.D11_5 U01.D12_5 U01.D13_5 U01.D14_5 U01.D15_5 U01.U_5_N U01.U_5_P U01.UDM_5 U02.D8_5 U02.D9_5 U02.D10_5 U02.D11_5 U02.D12_5 U02.D13_5 U02.D14_5 U02.D15_5 U02.U_5_N U02.U_5_P U02.UDM_5 U03.D8_5 U03.D9_5 U03.D10_5 U03.D11_5 U03.D12_5 U03.D13_5 U03.D14_5 U03.D15_5 U03.U_5_N U03.U_5_P U03.UDM_5 U30.D8_5 U30.D9_5 U30.D10_5 U30.D11_5 U30.D12_5 U30.D13_5 U30.D14_5 U30.D15_5 U30.U_5_N U30.U_5_P U30.UDM_5 U31.D8_5 U31.D9_5 U31.D10_5 U31.D11_5 U31.D12_5 U31.D13_5 U31.D14_5 U31.D15_5 U31.U_5_N U31.U_5_P U31.UDM_5 U32.D8_5 U32.D9_5 U32.D10_5 U32.D11_5 U32.D12_5 U32.D13_5 U32.D14_5 U32.D15_5 U32.U_5_N U32.U_5_P U32.UDM_5 U33.D8_5 U33.D9_5 U33.D10_5 U33.D11_5 U33.D12_5 U33.D13_5 U33.D14_5 U33.D15_5 U33.U_5_N U33.U_5_P U33.UDM_5
net class F00_DDR3_DQSDiff: L00.L_5_N L00.L_5_P L00.U_5_N L00.U_5_P L01.L_5_N L01.L_5_P L01.U_5_N L01.U_5_P L02.L_5_N L02.L_5_P L02.U_5_N L02.U_5_P L03.L_5_N L03.L_5_P L03.U_5_N L03.U_5_P L30.L_5_N L30.L_5_P L30.U_5_N L30.U_5_P L31.L_5_N L31.L_5_P L31.U_5_N L31.U_5_P L32.L_5_N L32.L_5_P L32.U_5_N L32.U_5_P L33.L_5_N L33.L_5_P L33.U_5_N L33.U_5_P U00.L_5_N U00.L_5_P U00.U_5_N U00.U_5_P U01.L_5_N U01.L_5_P U01.U_5_N U01.U_5_P U02.L_5_N U02.L_5_P U02.U_5_N U02.U_5_P U03.L_5_N U03.L_5_P U03.U_5_N U03.U_5_P U30.L_5_N U30.L_5_P U30.U_5_N U30.U_5_P U31.L_5_N U31.L_5_P U31.U_5_N U31.U_5_P U32.L_5_N U32.L_5_P U32.U_5_N U32.U_5_P U33.L_5_N U33.L_5_P U33.U_5_N U33.U_5_P
net class GIL: GIL.GIL0_5 GIL.GIL1_5 GIL.GIL2_5 GIL.GIL3_5 GIL.GIL4_5 GIL.GIL5_5 GIL.GIL6_5 GIL.GIL7_5 GIL.GIL8_5 GIL.GIL9_5 GIL.GIL10_5 GIL.GIL11_5
net class GPMCI: GPMCI.S0_5 GPMCI.S1_5 GPMCI.S2_5 GPMCI.S3_5 GPMCI.S4_5 GPMCI.S5_5 GPMCI.S6_5 GPMCI.S7_5 GPMCI.S8_5 GPMCI.S9_5 GPMCI.S10_5 GPMCI.S11_5 GPMCI.S12_5 GPMCI.S13_5 GPMCI.S14_5 GPMCI.S15_5 GPMCI.S16_5 GPMCI.S17_5 GPMCI.S18_5 GPMCI.S19_5 GPMCI.S20_5 GPMCI.S21_5 GPMCI.S22_5
net class GPMCO: GPMCO.S0_5 GPMCO.S1_5 GPMCO.S2_5 GPMCO.S3_5 GPMCO.S4_5 GPMCO.S5_5 GPMCO.S6_5 GPMCO.S7_5 GPMCO.S8_5 GPMCO.S9_5 GPMCO.S10_5 GPMCO.S11_5 GPMCO.S12_5 GPMCO.S13_5 GPMCO.S14_5 GPMCO.S15_5 GPMCO.S16_5 GPMCO.S17_5 GPMCO.S18_5 GPMCO.S19_5 GPMCO.S20_5 GPMCO.S21_5 GPMCO.S22_5
net class IL07_00-J3A: IL07_00-J3A.DDRCC.S01C_5_N IL07_00-J3A.DDRCC.S01C_5_P IL07_00-J3A.DDRCC.S2_5 IL07_00-J3A.DDRCC.S3_5 IL07_00-J3A.DDRCC.S4_5 IL07_00-J3A.DDRCC.S5_5 IL07_00-J3A.DDRCC.S6_5 IL07_00-J3A.DDRCC.S7_5 IL07_00-J3A.DDRCC.S8_5 IL07_00-J3A.DDRCC.S9_5 IL07_00-J3A.DDRCC.S10_5 IL07_00-J3A.DDRCC.S11_5 IL07_00-J3A.DDRCC.S12_5 IL07_00-J3A.DDRCC.S13_5 IL07_00-J3A.DDRCC.S14_5 IL07_00-J3A.DDRCC.S15_5 IL07_00-J3A.DDRCC.S16_5 IL07_00-J3A.DDRCC.S17_5 IL07_00-J3A.DDRCC.S18_5 IL07_00-J3A.DDRCC.S19_5 IL07_00-J3A.DDRCC.S20_5 IL07_00-J3A.DDRCC.S21_5 IL07_00-J3A.DDRCC.S22_5 IL07_00-J3A.DDRCC.S23_5 IL07_00-J3A.DDRCC.S24_5 IL07_00-J3A.DDRCC.S25_5 IL07_00-J3A.DDRCC.S26_5 IL07_00-J3A.DDRCC.S27_5 IL07_00-J3A.DDRCC.S28_5 IL07_00-J3A.DDRCC.S29_5 IL07_00-J3A.DDRCC.S30_5 IL07_00-J3A.DDRCC.S31_5 IL07_00-J3A.DDRCC.S32_5 IL07_00-J3A.DDRCC.S33_5 IL07_00-J3A.DDRCC.S34_5 IL07_00-J3A.DDRCC.S35_5 IL07_00-J3A.DDRCC.S36_5 IL07_00-J3A.DDRCC.S37_5 IL07_00-J3A.DDRCC.S38_5 IL07_00-J3A.DDRCC.S39_5 IL07_00-J3A.DDRCC.S40_5 IL07_00-J3A.DDRCC.S41_5 IL07_00-J3A.DDRCC.S42_5 IL07_00-J3A.DDRCC.S43_5 IL07_00-J3A.DDRCC.S44_5 IL07_00-J3A.DDRCC.S45_5 IL07_00-J3A.DDRCC.S46_5 IL07_00-J3A.SDRCC.GPIO8.D0_5 IL07_00-J3A.SDRCC.GPIO8.D1_5 IL07_00-J3A.SDRCC.GPIO8.D2_5 IL07_00-J3A.SDRCC.GPIO8.D3_5 IL07_00-J3A.SDRCC.GPIO8.D4_5 IL07_00-J3A.SDRCC.GPIO8.D5_5 IL07_00-J3A.SDRCC.GPIO8.D6_5 IL07_00-J3A.SDRCC.GPIO8.D7_5 IL07_00-J3A.SDRCC.GPIO15.D01C_5_N IL07_00-J3A.SDRCC.GPIO15.D01C_5_P IL07_00-J3A.SDRCC.GPIO15.D2_5 IL07_00-J3A.SDRCC.GPIO15.D3_5 IL07_00-J3A.SDRCC.GPIO15.D4_5 IL07_00-J3A.SDRCC.GPIO15.D5_5 IL07_00-J3A.SDRCC.GPIO15.D6_5 IL07_00-J3A.SDRCC.GPIO15.D7_5 IL07_00-J3A.SDRCC.GPIO15.D8_5 IL07_00-J3A.SDRCC.GPIO15.D9_5 IL07_00-J3A.SDRCC.GPIO15.D10_5 IL07_00-J3A.SDRCC.GPIO15.D11_5 IL07_00-J3A.SDRCC.GPIO15.D12_5 IL07_00-J3A.SDRCC.GPIO15.D13_5 IL07_00-J3A.SDRCC.GPIO15.D14_5
net class IL12_00-07_01: IL12_00-07_01.DDRCC.S01C_5_N IL12_00-07_01.DDRCC.S01C_5_P IL12_00-07_01.DDRCC.S2_5 IL12_00-07_01.DDRCC.S3_5 IL12_00-07_01.DDRCC.S4_5 IL12_00-07_01.DDRCC.S5_5 IL12_00-07_01.DDRCC.S6_5 IL12_00-07_01.DDRCC.S7_5 IL12_00-07_01.DDRCC.S8_5 IL12_00-07_01.DDRCC.S9_5 IL12_00-07_01.DDRCC.S10_5 IL12_00-07_01.DDRCC.S11_5 IL12_00-07_01.DDRCC.S12_5 IL12_00-07_01.DDRCC.S13_5 IL12_00-07_01.DDRCC.S14_5 IL12_00-07_01.DDRCC.S15_5 IL12_00-07_01.DDRCC.S16_5 IL12_00-07_01.DDRCC.S17_5 IL12_00-07_01.DDRCC.S18_5 IL12_00-07_01.DDRCC.S19_5 IL12_00-07_01.DDRCC.S20_5 IL12_00-07_01.DDRCC.S21_5 IL12_00-07_01.DDRCC.S22_5 IL12_00-07_01.DDRCC.S23_5 IL12_00-07_01.DDRCC.S24_5 IL12_00-07_01.DDRCC.S25_5 IL12_00-07_01.DDRCC.S26_5 IL12_00-07_01.DDRCC.S27_5 IL12_00-07_01.DDRCC.S28_5 IL12_00-07_01.DDRCC.S29_5 IL12_00-07_01.DDRCC.S30_5 IL12_00-07_01.DDRCC.S31_5 IL12_00-07_01.DDRCC.S32_5 IL12_00-07_01.DDRCC.S33_5 IL12_00-07_01.DDRCC.S34_5 IL12_00-07_01.DDRCC.S35_5 IL12_00-07_01.DDRCC.S36_5 IL12_00-07_01.DDRCC.S37_5 IL12_00-07_01.DDRCC.S38_5 IL12_00-07_01.DDRCC.S39_5 IL12_00-07_01.DDRCC.S40_5 IL12_00-07_01.DDRCC.S41_5 IL12_00-07_01.DDRCC.S42_5 IL12_00-07_01.DDRCC.S43_5 IL12_00-07_01.DDRCC.S44_5 IL12_00-07_01.DDRCC.S45_5 IL12_00-07_01.DDRCC.S46_5 IL12_00-07_01.SDRCC.GPIO8.D0_5 IL12_00-07_01.SDRCC.GPIO8.D1_5 IL12_00-07_01.SDRCC.GPIO8.D2_5 IL12_00-07_01.SDRCC.GPIO8.D3_5 IL12_00-07_01.SDRCC.GPIO8.D4_5 IL12_00-07_01.SDRCC.GPIO8.D5_5 IL12_00-07_01.SDRCC.GPIO8.D6_5 IL12_00-07_01.SDRCC.GPIO8.D7_5 IL12_00-07_01.SDRCC.GPIO15.D01C_5_N IL12_00-07_01.SDRCC.GPIO15.D01C_5_P IL12_00-07_01.SDRCC.GPIO15.D2_5 IL12_00-07_01.SDRCC.GPIO15.D3_5 IL12_00-07_01.SDRCC.GPIO15.D4_5 IL12_00-07_01.SDRCC.GPIO15.D5_5 IL12_00-07_01.SDRCC.GPIO15.D6_5 IL12_00-07_01.SDRCC.GPIO15.D7_5 IL12_00-07_01.SDRCC.GPIO15.D8_5 IL12_00-07_01.SDRCC.GPIO15.D9_5 IL12_00-07_01.SDRCC.GPIO15.D10_5 IL12_00-07_01.SDRCC.GPIO15.D11_5 IL12_00-07_01.SDRCC.GPIO15.D12_5 IL12_00-07_01.SDRCC.GPIO15.D13_5 IL12_00-07_01.SDRCC.GPIO15.D14_5
net class IL12_01-07_02: IL12_01-07_02.DDRCC.S01C_5_N IL12_01-07_02.DDRCC.S01C_5_P IL12_01-07_02.DDRCC.S2_5 IL12_01-07_02.DDRCC.S3_5 IL12_01-07_02.DDRCC.S4_5 IL12_01-07_02.DDRCC.S5_5 IL12_01-07_02.DDRCC.S6_5 IL12_01-07_02.DDRCC.S7_5 IL12_01-07_02.DDRCC.S8_5 IL12_01-07_02.DDRCC.S9_5 IL12_01-07_02.DDRCC.S10_5 IL12_01-07_02.DDRCC.S11_5 IL12_01-07_02.DDRCC.S12_5 IL12_01-07_02.DDRCC.S13_5 IL12_01-07_02.DDRCC.S14_5 IL12_01-07_02.DDRCC.S15_5 IL12_01-07_02.DDRCC.S16_5 IL12_01-07_02.DDRCC.S17_5 IL12_01-07_02.DDRCC.S18_5 IL12_01-07_02.DDRCC.S19_5 IL12_01-07_02.DDRCC.S20_5 IL12_01-07_02.DDRCC.S21_5 IL12_01-07_02.DDRCC.S22_5 IL12_01-07_02.DDRCC.S23_5 IL12_01-07_02.DDRCC.S24_5 IL12_01-07_02.DDRCC.S25_5 IL12_01-07_02.DDRCC.S26_5 IL12_01-07_02.DDRCC.S27_5 IL12_01-07_02.DDRCC.S28_5 IL12_01-07_02.DDRCC.S29_5 IL12_01-07_02.DDRCC.S30_5 IL12_01-07_02.DDRCC.S31_5 IL12_01-07_02.DDRCC.S32_5 IL12_01-07_02.DDRCC.S33_5 IL12_01-07_02.DDRCC.S34_5 IL12_01-07_02.DDRCC.S35_5 IL12_01-07_02.DDRCC.S36_5 IL12_01-07_02.DDRCC.S37_5 IL12_01-07_02.DDRCC.S38_5 IL12_01-07_02.DDRCC.S39_5 IL12_01-07_02.DDRCC.S40_5 IL12_01-07_02.DDRCC.S41_5 IL12_01-07_02.DDRCC.S42_5 IL12_01-07_02.DDRCC.S43_5 IL12_01-07_02.DDRCC.S44_5 IL12_01-07_02.DDRCC.S45_5 IL12_01-07_02.DDRCC.S46_5 IL12_01-07_02.SDRCC.GPIO8.D0_5 IL12_01-07_02.SDRCC.GPIO8.D1_5 IL12_01-07_02.SDRCC.GPIO8.D2_5 IL12_01-07_02.SDRCC.GPIO8.D3_5 IL12_01-07_02.SDRCC.GPIO8.D4_5 IL12_01-07_02.SDRCC.GPIO8.D5_5 IL12_01-07_02.SDRCC.GPIO8.D6_5 IL12_01-07_02.SDRCC.GPIO8.D7_5 IL12_01-07_02.SDRCC.GPIO15.D01C_5_N IL12_01-07_02.SDRCC.GPIO15.D01C_5_P IL12_01-07_02.SDRCC.GPIO15.D2_5 IL12_01-07_02.SDRCC.GPIO15.D3_5 IL12_01-07_02.SDRCC.GPIO15.D4_5 IL12_01-07_02.SDRCC.GPIO15.D5_5 IL12_01-07_02.SDRCC.GPIO15.D6_5 IL12_01-07_02.SDRCC.GPIO15.D7_5 IL12_01-07_02.SDRCC.GPIO15.D8_5 IL12_01-07_02.SDRCC.GPIO15.D9_5 IL12_01-07_02.SDRCC.GPIO15.D10_5 IL12_01-07_02.SDRCC.GPIO15.D11_5 IL12_01-07_02.SDRCC.GPIO15.D12_5 IL12_01-07_02.SDRCC.GPIO15.D13_5 IL12_01-07_02.SDRCC.GPIO15.D14_5
net class IL12_02-07_03: IL12_02-07_03.DDRCC.S01C_5_N IL12_02-07_03.DDRCC.S01C_5_P IL12_02-07_03.DDRCC.S2_5 IL12_02-07_03.DDRCC.S3_5 IL12_02-07_03.DDRCC.S4_5 IL12_02-07_03.DDRCC.S5_5 IL12_02-07_03.DDRCC.S6_5 IL12_02-07_03.DDRCC.S7_5 IL12_02-07_03.DDRCC.S8_5 IL12_02-07_03.DDRCC.S9_5 IL12_02-07_03.DDRCC.S10_5 IL12_02-07_03.DDRCC.S11_5 IL12_02-07_03.DDRCC.S12_5 IL12_02-07_03.DDRCC.S13_5 IL12_02-07_03.DDRCC.S14_5 IL12_02-07_03.DDRCC.S15_5 IL12_02-07_03.DDRCC.S16_5 IL12_02-07_03.DDRCC.S17_5 IL12_02-07_03.DDRCC.S18_5 IL12_02-07_03.DDRCC.S19_5 IL12_02-07_03.DDRCC.S20_5 IL12_02-07_03.DDRCC.S21_5 IL12_02-07_03.DDRCC.S22_5 IL12_02-07_03.DDRCC.S23_5 IL12_02-07_03.DDRCC.S24_5 IL12_02-07_03.DDRCC.S25_5 IL12_02-07_03.DDRCC.S26_5 IL12_02-07_03.DDRCC.S27_5 IL12_02-07_03.DDRCC.S28_5 IL12_02-07_03.DDRCC.S29_5 IL12_02-07_03.DDRCC.S30_5 IL12_02-07_03.DDRCC.S31_5 IL12_02-07_03.DDRCC.S32_5 IL12_02-07_03.DDRCC.S33_5 IL12_02-07_03.DDRCC.S34_5 IL12_02-07_03.DDRCC.S35_5 IL12_02-07_03.DDRCC.S36_5 IL12_02-07_03.DDRCC.S37_5 IL12_02-07_03.DDRCC.S38_5 IL12_02-07_03.DDRCC.S39_5 IL12_02-07_03.DDRCC.S40_5 IL12_02-07_03.DDRCC.S41_5 IL12_02-07_03.DDRCC.S42_5 IL12_02-07_03.DDRCC.S43_5 IL12_02-07_03.DDRCC.S44_5 IL12_02-07_03.DDRCC.S45_5 IL12_02-07_03.DDRCC.S46_5 IL12_02-07_03.SDRCC.GPIO8.D0_5 IL12_02-07_03.SDRCC.GPIO8.D1_5 IL12_02-07_03.SDRCC.GPIO8.D2_5 IL12_02-07_03.SDRCC.GPIO8.D3_5 IL12_02-07_03.SDRCC.GPIO8.D4_5 IL12_02-07_03.SDRCC.GPIO8.D5_5 IL12_02-07_03.SDRCC.GPIO8.D6_5 IL12_02-07_03.SDRCC.GPIO8.D7_5 IL12_02-07_03.SDRCC.GPIO15.D01C_5_N IL12_02-07_03.SDRCC.GPIO15.D01C_5_P IL12_02-07_03.SDRCC.GPIO15.D2_5 IL12_02-07_03.SDRCC.GPIO15.D3_5 IL12_02-07_03.SDRCC.GPIO15.D4_5 IL12_02-07_03.SDRCC.GPIO15.D5_5 IL12_02-07_03.SDRCC.GPIO15.D6_5 IL12_02-07_03.SDRCC.GPIO15.D7_5 IL12_02-07_03.SDRCC.GPIO15.D8_5 IL12_02-07_03.SDRCC.GPIO15.D9_5 IL12_02-07_03.SDRCC.GPIO15.D10_5 IL12_02-07_03.SDRCC.GPIO15.D11_5 IL12_02-07_03.SDRCC.GPIO15.D12_5 IL12_02-07_03.SDRCC.GPIO15.D13_5 IL12_02-07_03.SDRCC.GPIO15.D14_5
net class IL12_03-J2B: IL12_03-J2B.DDRCC.S01C_5_N IL12_03-J2B.DDRCC.S01C_5_P IL12_03-J2B.DDRCC.S2_5 IL12_03-J2B.DDRCC.S3_5 IL12_03-J2B.DDRCC.S4_5 IL12_03-J2B.DDRCC.S5_5 IL12_03-J2B.DDRCC.S6_5 IL12_03-J2B.DDRCC.S7_5 IL12_03-J2B.DDRCC.S8_5 IL12_03-J2B.DDRCC.S9_5 IL12_03-J2B.DDRCC.S10_5 IL12_03-J2B.DDRCC.S11_5 IL12_03-J2B.DDRCC.S12_5 IL12_03-J2B.DDRCC.S13_5 IL12_03-J2B.DDRCC.S14_5 IL12_03-J2B.DDRCC.S15_5 IL12_03-J2B.DDRCC.S16_5 IL12_03-J2B.DDRCC.S17_5 IL12_03-J2B.DDRCC.S18_5 IL12_03-J2B.DDRCC.S19_5 IL12_03-J2B.DDRCC.S20_5 IL12_03-J2B.DDRCC.S21_5 IL12_03-J2B.DDRCC.S22_5 IL12_03-J2B.DDRCC.S23_5 IL12_03-J2B.DDRCC.S24_5 IL12_03-J2B.DDRCC.S25_5 IL12_03-J2B.DDRCC.S26_5 IL12_03-J2B.DDRCC.S27_5 IL12_03-J2B.DDRCC.S28_5 IL12_03-J2B.DDRCC.S29_5 IL12_03-J2B.DDRCC.S30_5 IL12_03-J2B.DDRCC.S31_5 IL12_03-J2B.DDRCC.S32_5 IL12_03-J2B.DDRCC.S33_5 IL12_03-J2B.DDRCC.S34_5 IL12_03-J2B.DDRCC.S35_5 IL12_03-J2B.DDRCC.S36_5 IL12_03-J2B.DDRCC.S37_5 IL12_03-J2B.DDRCC.S38_5 IL12_03-J2B.DDRCC.S39_5 IL12_03-J2B.DDRCC.S40_5 IL12_03-J2B.DDRCC.S41_5 IL12_03-J2B.DDRCC.S42_5 IL12_03-J2B.DDRCC.S43_5 IL12_03-J2B.DDRCC.S44_5 IL12_03-J2B.DDRCC.S45_5 IL12_03-J2B.DDRCC.S46_5 IL12_03-J2B.SDRCC.GPIO8.D0_5 IL12_03-J2B.SDRCC.GPIO8.D1_5 IL12_03-J2B.SDRCC.GPIO8.D2_5 IL12_03-J2B.SDRCC.GPIO8.D3_5 IL12_03-J2B.SDRCC.GPIO8.D4_5 IL12_03-J2B.SDRCC.GPIO8.D5_5 IL12_03-J2B.SDRCC.GPIO8.D6_5 IL12_03-J2B.SDRCC.GPIO8.D7_5 IL12_03-J2B.SDRCC.GPIO15.D01C_5_N IL12_03-J2B.SDRCC.GPIO15.D01C_5_P IL12_03-J2B.SDRCC.GPIO15.D2_5 IL12_03-J2B.SDRCC.GPIO15.D3_5 IL12_03-J2B.SDRCC.GPIO15.D4_5 IL12_03-J2B.SDRCC.GPIO15.D5_5 IL12_03-J2B.SDRCC.GPIO15.D6_5 IL12_03-J2B.SDRCC.GPIO15.D7_5 IL12_03-J2B.SDRCC.GPIO15.D8_5 IL12_03-J2B.SDRCC.GPIO15.D9_5 IL12_03-J2B.SDRCC.GPIO15.D10_5 IL12_03-J2B.SDRCC.GPIO15.D11_5 IL12_03-J2B.SDRCC.GPIO15.D12_5 IL12_03-J2B.SDRCC.GPIO15.D13_5 IL12_03-J2B.SDRCC.GPIO15.D14_5
net class IL12_10-68_11: IL12_10-68_11.DDRCC.S01C_5_N IL12_10-68_11.DDRCC.S01C_5_P IL12_10-68_11.DDRCC.S2_5 IL12_10-68_11.DDRCC.S3_5 IL12_10-68_11.DDRCC.S4_5 IL12_10-68_11.DDRCC.S5_5 IL12_10-68_11.DDRCC.S6_5 IL12_10-68_11.DDRCC.S7_5 IL12_10-68_11.DDRCC.S8_5 IL12_10-68_11.DDRCC.S9_5 IL12_10-68_11.DDRCC.S10_5 IL12_10-68_11.DDRCC.S11_5 IL12_10-68_11.DDRCC.S12_5 IL12_10-68_11.DDRCC.S13_5 IL12_10-68_11.DDRCC.S14_5 IL12_10-68_11.DDRCC.S15_5 IL12_10-68_11.DDRCC.S16_5 IL12_10-68_11.DDRCC.S17_5 IL12_10-68_11.DDRCC.S18_5 IL12_10-68_11.DDRCC.S19_5 IL12_10-68_11.DDRCC.S20_5 IL12_10-68_11.DDRCC.S21_5 IL12_10-68_11.DDRCC.S22_5 IL12_10-68_11.DDRCC.S23_5 IL12_10-68_11.DDRCC.S24_5 IL12_10-68_11.DDRCC.S25_5 IL12_10-68_11.DDRCC.S26_5 IL12_10-68_11.DDRCC.S27_5 IL12_10-68_11.DDRCC.S28_5 IL12_10-68_11.DDRCC.S29_5 IL12_10-68_11.DDRCC.S30_5 IL12_10-68_11.DDRCC.S31_5 IL12_10-68_11.DDRCC.S32_5 IL12_10-68_11.DDRCC.S33_5 IL12_10-68_11.DDRCC.S34_5 IL12_10-68_11.DDRCC.S35_5 IL12_10-68_11.DDRCC.S36_5 IL12_10-68_11.DDRCC.S37_5 IL12_10-68_11.DDRCC.S38_5 IL12_10-68_11.DDRCC.S39_5 IL12_10-68_11.DDRCC.S40_5 IL12_10-68_11.DDRCC.S41_5 IL12_10-68_11.DDRCC.S42_5 IL12_10-68_11.DDRCC.S43_5 IL12_10-68_11.DDRCC.S44_5 IL12_10-68_11.DDRCC.S45_5 IL12_10-68_11.DDRCC.S46_5 IL12_10-68_11.SDRCC.GPIO8.D0_5 IL12_10-68_11.SDRCC.GPIO8.D1_5 IL12_10-68_11.SDRCC.GPIO8.D2_5 IL12_10-68_11.SDRCC.GPIO8.D3_5 IL12_10-68_11.SDRCC.GPIO8.D4_5 IL12_10-68_11.SDRCC.GPIO8.D5_5 IL12_10-68_11.SDRCC.GPIO8.D6_5 IL12_10-68_11.SDRCC.GPIO8.D7_5 IL12_10-68_11.SDRCC.GPIO15.D01C_5_N IL12_10-68_11.SDRCC.GPIO15.D01C_5_P IL12_10-68_11.SDRCC.GPIO15.D2_5 IL12_10-68_11.SDRCC.GPIO15.D3_5 IL12_10-68_11.SDRCC.GPIO15.D4_5 IL12_10-68_11.SDRCC.GPIO15.D5_5 IL12_10-68_11.SDRCC.GPIO15.D6_5 IL12_10-68_11.SDRCC.GPIO15.D7_5 IL12_10-68_11.SDRCC.GPIO15.D8_5 IL12_10-68_11.SDRCC.GPIO15.D9_5 IL12_10-68_11.SDRCC.GPIO15.D10_5 IL12_10-68_11.SDRCC.GPIO15.D11_5 IL12_10-68_11.SDRCC.GPIO15.D12_5 IL12_10-68_11.SDRCC.GPIO15.D13_5 IL12_10-68_11.SDRCC.GPIO15.D14_5
net class IL12_11-68_12: IL12_11-68_12.DDRCC.S01C_5_N IL12_11-68_12.DDRCC.S01C_5_P IL12_11-68_12.DDRCC.S2_5 IL12_11-68_12.DDRCC.S3_5 IL12_11-68_12.DDRCC.S4_5 IL12_11-68_12.DDRCC.S5_5 IL12_11-68_12.DDRCC.S6_5 IL12_11-68_12.DDRCC.S7_5 IL12_11-68_12.DDRCC.S8_5 IL12_11-68_12.DDRCC.S9_5 IL12_11-68_12.DDRCC.S10_5 IL12_11-68_12.DDRCC.S11_5 IL12_11-68_12.DDRCC.S12_5 IL12_11-68_12.DDRCC.S13_5 IL12_11-68_12.DDRCC.S14_5 IL12_11-68_12.DDRCC.S15_5 IL12_11-68_12.DDRCC.S16_5 IL12_11-68_12.DDRCC.S17_5 IL12_11-68_12.DDRCC.S18_5 IL12_11-68_12.DDRCC.S19_5 IL12_11-68_12.DDRCC.S20_5 IL12_11-68_12.DDRCC.S21_5 IL12_11-68_12.DDRCC.S22_5 IL12_11-68_12.DDRCC.S23_5 IL12_11-68_12.DDRCC.S24_5 IL12_11-68_12.DDRCC.S25_5 IL12_11-68_12.DDRCC.S26_5 IL12_11-68_12.DDRCC.S27_5 IL12_11-68_12.DDRCC.S28_5 IL12_11-68_12.DDRCC.S29_5 IL12_11-68_12.DDRCC.S30_5 IL12_11-68_12.DDRCC.S31_5 IL12_11-68_12.DDRCC.S32_5 IL12_11-68_12.DDRCC.S33_5 IL12_11-68_12.DDRCC.S34_5 IL12_11-68_12.DDRCC.S35_5 IL12_11-68_12.DDRCC.S36_5 IL12_11-68_12.DDRCC.S37_5 IL12_11-68_12.DDRCC.S38_5 IL12_11-68_12.DDRCC.S39_5 IL12_11-68_12.DDRCC.S40_5 IL12_11-68_12.DDRCC.S41_5 IL12_11-68_12.DDRCC.S42_5 IL12_11-68_12.DDRCC.S43_5 IL12_11-68_12.DDRCC.S44_5 IL12_11-68_12.DDRCC.S45_5 IL12_11-68_12.DDRCC.S46_5 IL12_11-68_12.SDRCC.GPIO8.D0_5 IL12_11-68_12.SDRCC.GPIO8.D1_5 IL12_11-68_12.SDRCC.GPIO8.D2_5 IL12_11-68_12.SDRCC.GPIO8.D3_5 IL12_11-68_12.SDRCC.GPIO8.D4_5 IL12_11-68_12.SDRCC.GPIO8.D5_5 IL12_11-68_12.SDRCC.GPIO8.D6_5 IL12_11-68_12.SDRCC.GPIO8.D7_5 IL12_11-68_12.SDRCC.GPIO15.D01C_5_N IL12_11-68_12.SDRCC.GPIO15.D01C_5_P IL12_11-68_12.SDRCC.GPIO15.D2_5 IL12_11-68_12.SDRCC.GPIO15.D3_5 IL12_11-68_12.SDRCC.GPIO15.D4_5 IL12_11-68_12.SDRCC.GPIO15.D5_5 IL12_11-68_12.SDRCC.GPIO15.D6_5 IL12_11-68_12.SDRCC.GPIO15.D7_5 IL12_11-68_12.SDRCC.GPIO15.D8_5 IL12_11-68_12.SDRCC.GPIO15.D9_5 IL12_11-68_12.SDRCC.GPIO15.D10_5 IL12_11-68_12.SDRCC.GPIO15.D11_5 IL12_11-68_12.SDRCC.GPIO15.D12_5 IL12_11-68_12.SDRCC.GPIO15.D13_5 IL12_11-68_12.SDRCC.GPIO15.D14_5
net class IL12_12-68_13: IL12_12-68_13.DDRCC.S01C_5_N IL12_12-68_13.DDRCC.S01C_5_P IL12_12-68_13.DDRCC.S2_5 IL12_12-68_13.DDRCC.S3_5 IL12_12-68_13.DDRCC.S4_5 IL12_12-68_13.DDRCC.S5_5 IL12_12-68_13.DDRCC.S6_5 IL12_12-68_13.DDRCC.S7_5 IL12_12-68_13.DDRCC.S8_5 IL12_12-68_13.DDRCC.S9_5 IL12_12-68_13.DDRCC.S10_5 IL12_12-68_13.DDRCC.S11_5 IL12_12-68_13.DDRCC.S12_5 IL12_12-68_13.DDRCC.S13_5 IL12_12-68_13.DDRCC.S14_5 IL12_12-68_13.DDRCC.S15_5 IL12_12-68_13.DDRCC.S16_5 IL12_12-68_13.DDRCC.S17_5 IL12_12-68_13.DDRCC.S18_5 IL12_12-68_13.DDRCC.S19_5 IL12_12-68_13.DDRCC.S20_5 IL12_12-68_13.DDRCC.S21_5 IL12_12-68_13.DDRCC.S22_5 IL12_12-68_13.DDRCC.S23_5 IL12_12-68_13.DDRCC.S24_5 IL12_12-68_13.DDRCC.S25_5 IL12_12-68_13.DDRCC.S26_5 IL12_12-68_13.DDRCC.S27_5 IL12_12-68_13.DDRCC.S28_5 IL12_12-68_13.DDRCC.S29_5 IL12_12-68_13.DDRCC.S30_5 IL12_12-68_13.DDRCC.S31_5 IL12_12-68_13.DDRCC.S32_5 IL12_12-68_13.DDRCC.S33_5 IL12_12-68_13.DDRCC.S34_5 IL12_12-68_13.DDRCC.S35_5 IL12_12-68_13.DDRCC.S36_5 IL12_12-68_13.DDRCC.S37_5 IL12_12-68_13.DDRCC.S38_5 IL12_12-68_13.DDRCC.S39_5 IL12_12-68_13.DDRCC.S40_5 IL12_12-68_13.DDRCC.S41_5 IL12_12-68_13.DDRCC.S42_5 IL12_12-68_13.DDRCC.S43_5 IL12_12-68_13.DDRCC.S44_5 IL12_12-68_13.DDRCC.S45_5 IL12_12-68_13.DDRCC.S46_5 IL12_12-68_13.SDRCC.GPIO8.D0_5 IL12_12-68_13.SDRCC.GPIO8.D1_5 IL12_12-68_13.SDRCC.GPIO8.D2_5 IL12_12-68_13.SDRCC.GPIO8.D3_5 IL12_12-68_13.SDRCC.GPIO8.D4_5 IL12_12-68_13.SDRCC.GPIO8.D5_5 IL12_12-68_13.SDRCC.GPIO8.D6_5 IL12_12-68_13.SDRCC.GPIO8.D7_5 IL12_12-68_13.SDRCC.GPIO15.D01C_5_N IL12_12-68_13.SDRCC.GPIO15.D01C_5_P IL12_12-68_13.SDRCC.GPIO15.D2_5 IL12_12-68_13.SDRCC.GPIO15.D3_5 IL12_12-68_13.SDRCC.GPIO15.D4_5 IL12_12-68_13.SDRCC.GPIO15.D5_5 IL12_12-68_13.SDRCC.GPIO15.D6_5 IL12_12-68_13.SDRCC.GPIO15.D7_5 IL12_12-68_13.SDRCC.GPIO15.D8_5 IL12_12-68_13.SDRCC.GPIO15.D9_5 IL12_12-68_13.SDRCC.GPIO15.D10_5 IL12_12-68_13.SDRCC.GPIO15.D11_5 IL12_12-68_13.SDRCC.GPIO15.D12_5 IL12_12-68_13.SDRCC.GPIO15.D13_5 IL12_12-68_13.SDRCC.GPIO15.D14_5
net class IL12_13-J2A: IL12_13-J2A.DDRCC.S01C_5_N IL12_13-J2A.DDRCC.S01C_5_P IL12_13-J2A.DDRCC.S2_5 IL12_13-J2A.DDRCC.S3_5 IL12_13-J2A.DDRCC.S4_5 IL12_13-J2A.DDRCC.S5_5 IL12_13-J2A.DDRCC.S6_5 IL12_13-J2A.DDRCC.S7_5 IL12_13-J2A.DDRCC.S8_5 IL12_13-J2A.DDRCC.S9_5 IL12_13-J2A.DDRCC.S10_5 IL12_13-J2A.DDRCC.S11_5 IL12_13-J2A.DDRCC.S12_5 IL12_13-J2A.DDRCC.S13_5 IL12_13-J2A.DDRCC.S14_5 IL12_13-J2A.DDRCC.S15_5 IL12_13-J2A.DDRCC.S16_5 IL12_13-J2A.DDRCC.S17_5 IL12_13-J2A.DDRCC.S18_5 IL12_13-J2A.DDRCC.S19_5 IL12_13-J2A.DDRCC.S20_5 IL12_13-J2A.DDRCC.S21_5 IL12_13-J2A.DDRCC.S22_5 IL12_13-J2A.DDRCC.S23_5 IL12_13-J2A.DDRCC.S24_5 IL12_13-J2A.DDRCC.S25_5 IL12_13-J2A.DDRCC.S26_5 IL12_13-J2A.DDRCC.S27_5 IL12_13-J2A.DDRCC.S28_5 IL12_13-J2A.DDRCC.S29_5 IL12_13-J2A.DDRCC.S30_5 IL12_13-J2A.DDRCC.S31_5 IL12_13-J2A.DDRCC.S32_5 IL12_13-J2A.DDRCC.S33_5 IL12_13-J2A.DDRCC.S34_5 IL12_13-J2A.DDRCC.S35_5 IL12_13-J2A.DDRCC.S36_5 IL12_13-J2A.DDRCC.S37_5 IL12_13-J2A.DDRCC.S38_5 IL12_13-J2A.DDRCC.S39_5 IL12_13-J2A.DDRCC.S40_5 IL12_13-J2A.DDRCC.S41_5 IL12_13-J2A.DDRCC.S42_5 IL12_13-J2A.DDRCC.S43_5 IL12_13-J2A.DDRCC.S44_5 IL12_13-J2A.DDRCC.S45_5 IL12_13-J2A.DDRCC.S46_5 IL12_13-J2A.SDRCC.GPIO8.D0_5 IL12_13-J2A.SDRCC.GPIO8.D1_5 IL12_13-J2A.SDRCC.GPIO8.D2_5 IL12_13-J2A.SDRCC.GPIO8.D3_5 IL12_13-J2A.SDRCC.GPIO8.D4_5 IL12_13-J2A.SDRCC.GPIO8.D5_5 IL12_13-J2A.SDRCC.GPIO8.D6_5 IL12_13-J2A.SDRCC.GPIO8.D7_5 IL12_13-J2A.SDRCC.GPIO15.D01C_5_N IL12_13-J2A.SDRCC.GPIO15.D01C_5_P IL12_13-J2A.SDRCC.GPIO15.D2_5 IL12_13-J2A.SDRCC.GPIO15.D3_5 IL12_13-J2A.SDRCC.GPIO15.D4_5 IL12_13-J2A.SDRCC.GPIO15.D5_5 IL12_13-J2A.SDRCC.GPIO15.D6_5 IL12_13-J2A.SDRCC.GPIO15.D7_5 IL12_13-J2A.SDRCC.GPIO15.D8_5 IL12_13-J2A.SDRCC.GPIO15.D9_5 IL12_13-J2A.SDRCC.GPIO15.D10_5 IL12_13-J2A.SDRCC.GPIO15.D11_5 IL12_13-J2A.SDRCC.GPIO15.D12_5 IL12_13-J2A.SDRCC.GPIO15.D13_5 IL12_13-J2A.SDRCC.GPIO15.D14_5
net class IL12_20-68_21: IL12_20-68_21.DDRCC.S01C_5_N IL12_20-68_21.DDRCC.S01C_5_P IL12_20-68_21.DDRCC.S2_5 IL12_20-68_21.DDRCC.S3_5 IL12_20-68_21.DDRCC.S4_5 IL12_20-68_21.DDRCC.S5_5 IL12_20-68_21.DDRCC.S6_5 IL12_20-68_21.DDRCC.S7_5 IL12_20-68_21.DDRCC.S8_5 IL12_20-68_21.DDRCC.S9_5 IL12_20-68_21.DDRCC.S10_5 IL12_20-68_21.DDRCC.S11_5 IL12_20-68_21.DDRCC.S12_5 IL12_20-68_21.DDRCC.S13_5 IL12_20-68_21.DDRCC.S14_5 IL12_20-68_21.DDRCC.S15_5 IL12_20-68_21.DDRCC.S16_5 IL12_20-68_21.DDRCC.S17_5 IL12_20-68_21.DDRCC.S18_5 IL12_20-68_21.DDRCC.S19_5 IL12_20-68_21.DDRCC.S20_5 IL12_20-68_21.DDRCC.S21_5 IL12_20-68_21.DDRCC.S22_5 IL12_20-68_21.DDRCC.S23_5 IL12_20-68_21.DDRCC.S24_5 IL12_20-68_21.DDRCC.S25_5 IL12_20-68_21.DDRCC.S26_5 IL12_20-68_21.DDRCC.S27_5 IL12_20-68_21.DDRCC.S28_5 IL12_20-68_21.DDRCC.S29_5 IL12_20-68_21.DDRCC.S30_5 IL12_20-68_21.DDRCC.S31_5 IL12_20-68_21.DDRCC.S32_5 IL12_20-68_21.DDRCC.S33_5 IL12_20-68_21.DDRCC.S34_5 IL12_20-68_21.DDRCC.S35_5 IL12_20-68_21.DDRCC.S36_5 IL12_20-68_21.DDRCC.S37_5 IL12_20-68_21.DDRCC.S38_5 IL12_20-68_21.DDRCC.S39_5 IL12_20-68_21.DDRCC.S40_5 IL12_20-68_21.DDRCC.S41_5 IL12_20-68_21.DDRCC.S42_5 IL12_20-68_21.DDRCC.S43_5 IL12_20-68_21.DDRCC.S44_5 IL12_20-68_21.DDRCC.S45_5 IL12_20-68_21.DDRCC.S46_5 IL12_20-68_21.SDRCC.GPIO8.D0_5 IL12_20-68_21.SDRCC.GPIO8.D1_5 IL12_20-68_21.SDRCC.GPIO8.D2_5 IL12_20-68_21.SDRCC.GPIO8.D3_5 IL12_20-68_21.SDRCC.GPIO8.D4_5 IL12_20-68_21.SDRCC.GPIO8.D5_5 IL12_20-68_21.SDRCC.GPIO8.D6_5 IL12_20-68_21.SDRCC.GPIO8.D7_5 IL12_20-68_21.SDRCC.GPIO15.D01C_5_N IL12_20-68_21.SDRCC.GPIO15.D01C_5_P IL12_20-68_21.SDRCC.GPIO15.D2_5 IL12_20-68_21.SDRCC.GPIO15.D3_5 IL12_20-68_21.SDRCC.GPIO15.D4_5 IL12_20-68_21.SDRCC.GPIO15.D5_5 IL12_20-68_21.SDRCC.GPIO15.D6_5 IL12_20-68_21.SDRCC.GPIO15.D7_5 IL12_20-68_21.SDRCC.GPIO15.D8_5 IL12_20-68_21.SDRCC.GPIO15.D9_5 IL12_20-68_21.SDRCC.GPIO15.D10_5 IL12_20-68_21.SDRCC.GPIO15.D11_5 IL12_20-68_21.SDRCC.GPIO15.D12_5 IL12_20-68_21.SDRCC.GPIO15.D13_5 IL12_20-68_21.SDRCC.GPIO15.D14_5
net class IL12_21-68_22: IL12_21-68_22.DDRCC.S01C_5_N IL12_21-68_22.DDRCC.S01C_5_P IL12_21-68_22.DDRCC.S2_5 IL12_21-68_22.DDRCC.S3_5 IL12_21-68_22.DDRCC.S4_5 IL12_21-68_22.DDRCC.S5_5 IL12_21-68_22.DDRCC.S6_5 IL12_21-68_22.DDRCC.S7_5 IL12_21-68_22.DDRCC.S8_5 IL12_21-68_22.DDRCC.S9_5 IL12_21-68_22.DDRCC.S10_5 IL12_21-68_22.DDRCC.S11_5 IL12_21-68_22.DDRCC.S12_5 IL12_21-68_22.DDRCC.S13_5 IL12_21-68_22.DDRCC.S14_5 IL12_21-68_22.DDRCC.S15_5 IL12_21-68_22.DDRCC.S16_5 IL12_21-68_22.DDRCC.S17_5 IL12_21-68_22.DDRCC.S18_5 IL12_21-68_22.DDRCC.S19_5 IL12_21-68_22.DDRCC.S20_5 IL12_21-68_22.DDRCC.S21_5 IL12_21-68_22.DDRCC.S22_5 IL12_21-68_22.DDRCC.S23_5 IL12_21-68_22.DDRCC.S24_5 IL12_21-68_22.DDRCC.S25_5 IL12_21-68_22.DDRCC.S26_5 IL12_21-68_22.DDRCC.S27_5 IL12_21-68_22.DDRCC.S28_5 IL12_21-68_22.DDRCC.S29_5 IL12_21-68_22.DDRCC.S30_5 IL12_21-68_22.DDRCC.S31_5 IL12_21-68_22.DDRCC.S32_5 IL12_21-68_22.DDRCC.S33_5 IL12_21-68_22.DDRCC.S34_5 IL12_21-68_22.DDRCC.S35_5 IL12_21-68_22.DDRCC.S36_5 IL12_21-68_22.DDRCC.S37_5 IL12_21-68_22.DDRCC.S38_5 IL12_21-68_22.DDRCC.S39_5 IL12_21-68_22.DDRCC.S40_5 IL12_21-68_22.DDRCC.S41_5 IL12_21-68_22.DDRCC.S42_5 IL12_21-68_22.DDRCC.S43_5 IL12_21-68_22.DDRCC.S44_5 IL12_21-68_22.DDRCC.S45_5 IL12_21-68_22.DDRCC.S46_5 IL12_21-68_22.SDRCC.GPIO8.D0_5 IL12_21-68_22.SDRCC.GPIO8.D1_5 IL12_21-68_22.SDRCC.GPIO8.D2_5 IL12_21-68_22.SDRCC.GPIO8.D3_5 IL12_21-68_22.SDRCC.GPIO8.D4_5 IL12_21-68_22.SDRCC.GPIO8.D5_5 IL12_21-68_22.SDRCC.GPIO8.D6_5 IL12_21-68_22.SDRCC.GPIO8.D7_5 IL12_21-68_22.SDRCC.GPIO15.D01C_5_N IL12_21-68_22.SDRCC.GPIO15.D01C_5_P IL12_21-68_22.SDRCC.GPIO15.D2_5 IL12_21-68_22.SDRCC.GPIO15.D3_5 IL12_21-68_22.SDRCC.GPIO15.D4_5 IL12_21-68_22.SDRCC.GPIO15.D5_5 IL12_21-68_22.SDRCC.GPIO15.D6_5 IL12_21-68_22.SDRCC.GPIO15.D7_5 IL12_21-68_22.SDRCC.GPIO15.D8_5 IL12_21-68_22.SDRCC.GPIO15.D9_5 IL12_21-68_22.SDRCC.GPIO15.D10_5 IL12_21-68_22.SDRCC.GPIO15.D11_5 IL12_21-68_22.SDRCC.GPIO15.D12_5 IL12_21-68_22.SDRCC.GPIO15.D13_5 IL12_21-68_22.SDRCC.GPIO15.D14_5
net class IL12_22-68_23: IL12_22-68_23.DDRCC.S01C_5_N IL12_22-68_23.DDRCC.S01C_5_P IL12_22-68_23.DDRCC.S2_5 IL12_22-68_23.DDRCC.S3_5 IL12_22-68_23.DDRCC.S4_5 IL12_22-68_23.DDRCC.S5_5 IL12_22-68_23.DDRCC.S6_5 IL12_22-68_23.DDRCC.S7_5 IL12_22-68_23.DDRCC.S8_5 IL12_22-68_23.DDRCC.S9_5 IL12_22-68_23.DDRCC.S10_5 IL12_22-68_23.DDRCC.S11_5 IL12_22-68_23.DDRCC.S12_5 IL12_22-68_23.DDRCC.S13_5 IL12_22-68_23.DDRCC.S14_5 IL12_22-68_23.DDRCC.S15_5 IL12_22-68_23.DDRCC.S16_5 IL12_22-68_23.DDRCC.S17_5 IL12_22-68_23.DDRCC.S18_5 IL12_22-68_23.DDRCC.S19_5 IL12_22-68_23.DDRCC.S20_5 IL12_22-68_23.DDRCC.S21_5 IL12_22-68_23.DDRCC.S22_5 IL12_22-68_23.DDRCC.S23_5 IL12_22-68_23.DDRCC.S24_5 IL12_22-68_23.DDRCC.S25_5 IL12_22-68_23.DDRCC.S26_5 IL12_22-68_23.DDRCC.S27_5 IL12_22-68_23.DDRCC.S28_5 IL12_22-68_23.DDRCC.S29_5 IL12_22-68_23.DDRCC.S30_5 IL12_22-68_23.DDRCC.S31_5 IL12_22-68_23.DDRCC.S32_5 IL12_22-68_23.DDRCC.S33_5 IL12_22-68_23.DDRCC.S34_5 IL12_22-68_23.DDRCC.S35_5 IL12_22-68_23.DDRCC.S36_5 IL12_22-68_23.DDRCC.S37_5 IL12_22-68_23.DDRCC.S38_5 IL12_22-68_23.DDRCC.S39_5 IL12_22-68_23.DDRCC.S40_5 IL12_22-68_23.DDRCC.S41_5 IL12_22-68_23.DDRCC.S42_5 IL12_22-68_23.DDRCC.S43_5 IL12_22-68_23.DDRCC.S44_5 IL12_22-68_23.DDRCC.S45_5 IL12_22-68_23.DDRCC.S46_5 IL12_22-68_23.SDRCC.GPIO8.D0_5 IL12_22-68_23.SDRCC.GPIO8.D1_5 IL12_22-68_23.SDRCC.GPIO8.D2_5 IL12_22-68_23.SDRCC.GPIO8.D3_5 IL12_22-68_23.SDRCC.GPIO8.D4_5 IL12_22-68_23.SDRCC.GPIO8.D5_5 IL12_22-68_23.SDRCC.GPIO8.D6_5 IL12_22-68_23.SDRCC.GPIO8.D7_5 IL12_22-68_23.SDRCC.GPIO15.D01C_5_N IL12_22-68_23.SDRCC.GPIO15.D01C_5_P IL12_22-68_23.SDRCC.GPIO15.D2_5 IL12_22-68_23.SDRCC.GPIO15.D3_5 IL12_22-68_23.SDRCC.GPIO15.D4_5 IL12_22-68_23.SDRCC.GPIO15.D5_5 IL12_22-68_23.SDRCC.GPIO15.D6_5 IL12_22-68_23.SDRCC.GPIO15.D7_5 IL12_22-68_23.SDRCC.GPIO15.D8_5 IL12_22-68_23.SDRCC.GPIO15.D9_5 IL12_22-68_23.SDRCC.GPIO15.D10_5 IL12_22-68_23.SDRCC.GPIO15.D11_5 IL12_22-68_23.SDRCC.GPIO15.D12_5 IL12_22-68_23.SDRCC.GPIO15.D13_5 IL12_22-68_23.SDRCC.GPIO15.D14_5
net class IL12_23-J1B: IL12_23-J1B.DDRCC.S01C_5_N IL12_23-J1B.DDRCC.S01C_5_P IL12_23-J1B.DDRCC.S2_5 IL12_23-J1B.DDRCC.S3_5 IL12_23-J1B.DDRCC.S4_5 IL12_23-J1B.DDRCC.S5_5 IL12_23-J1B.DDRCC.S6_5 IL12_23-J1B.DDRCC.S7_5 IL12_23-J1B.DDRCC.S8_5 IL12_23-J1B.DDRCC.S9_5 IL12_23-J1B.DDRCC.S10_5 IL12_23-J1B.DDRCC.S11_5 IL12_23-J1B.DDRCC.S12_5 IL12_23-J1B.DDRCC.S13_5 IL12_23-J1B.DDRCC.S14_5 IL12_23-J1B.DDRCC.S15_5 IL12_23-J1B.DDRCC.S16_5 IL12_23-J1B.DDRCC.S17_5 IL12_23-J1B.DDRCC.S18_5 IL12_23-J1B.DDRCC.S19_5 IL12_23-J1B.DDRCC.S20_5 IL12_23-J1B.DDRCC.S21_5 IL12_23-J1B.DDRCC.S22_5 IL12_23-J1B.DDRCC.S23_5 IL12_23-J1B.DDRCC.S24_5 IL12_23-J1B.DDRCC.S25_5 IL12_23-J1B.DDRCC.S26_5 IL12_23-J1B.DDRCC.S27_5 IL12_23-J1B.DDRCC.S28_5 IL12_23-J1B.DDRCC.S29_5 IL12_23-J1B.DDRCC.S30_5 IL12_23-J1B.DDRCC.S31_5 IL12_23-J1B.DDRCC.S32_5 IL12_23-J1B.DDRCC.S33_5 IL12_23-J1B.DDRCC.S34_5 IL12_23-J1B.DDRCC.S35_5 IL12_23-J1B.DDRCC.S36_5 IL12_23-J1B.DDRCC.S37_5 IL12_23-J1B.DDRCC.S38_5 IL12_23-J1B.DDRCC.S39_5 IL12_23-J1B.DDRCC.S40_5 IL12_23-J1B.DDRCC.S41_5 IL12_23-J1B.DDRCC.S42_5 IL12_23-J1B.DDRCC.S43_5 IL12_23-J1B.DDRCC.S44_5 IL12_23-J1B.DDRCC.S45_5 IL12_23-J1B.DDRCC.S46_5 IL12_23-J1B.SDRCC.GPIO8.D0_5 IL12_23-J1B.SDRCC.GPIO8.D1_5 IL12_23-J1B.SDRCC.GPIO8.D2_5 IL12_23-J1B.SDRCC.GPIO8.D3_5 IL12_23-J1B.SDRCC.GPIO8.D4_5 IL12_23-J1B.SDRCC.GPIO8.D5_5 IL12_23-J1B.SDRCC.GPIO8.D6_5 IL12_23-J1B.SDRCC.GPIO8.D7_5 IL12_23-J1B.SDRCC.GPIO15.D01C_5_N IL12_23-J1B.SDRCC.GPIO15.D01C_5_P IL12_23-J1B.SDRCC.GPIO15.D2_5 IL12_23-J1B.SDRCC.GPIO15.D3_5 IL12_23-J1B.SDRCC.GPIO15.D4_5 IL12_23-J1B.SDRCC.GPIO15.D5_5 IL12_23-J1B.SDRCC.GPIO15.D6_5 IL12_23-J1B.SDRCC.GPIO15.D7_5 IL12_23-J1B.SDRCC.GPIO15.D8_5 IL12_23-J1B.SDRCC.GPIO15.D9_5 IL12_23-J1B.SDRCC.GPIO15.D10_5 IL12_23-J1B.SDRCC.GPIO15.D11_5 IL12_23-J1B.SDRCC.GPIO15.D12_5 IL12_23-J1B.SDRCC.GPIO15.D13_5 IL12_23-J1B.SDRCC.GPIO15.D14_5
net class IL12_30-68_31: IL12_30-68_31.DDRCC.S01C_5_N IL12_30-68_31.DDRCC.S01C_5_P IL12_30-68_31.DDRCC.S2_5 IL12_30-68_31.DDRCC.S3_5 IL12_30-68_31.DDRCC.S4_5 IL12_30-68_31.DDRCC.S5_5 IL12_30-68_31.DDRCC.S6_5 IL12_30-68_31.DDRCC.S7_5 IL12_30-68_31.DDRCC.S8_5 IL12_30-68_31.DDRCC.S9_5 IL12_30-68_31.DDRCC.S10_5 IL12_30-68_31.DDRCC.S11_5 IL12_30-68_31.DDRCC.S12_5 IL12_30-68_31.DDRCC.S13_5 IL12_30-68_31.DDRCC.S14_5 IL12_30-68_31.DDRCC.S15_5 IL12_30-68_31.DDRCC.S16_5 IL12_30-68_31.DDRCC.S17_5 IL12_30-68_31.DDRCC.S18_5 IL12_30-68_31.DDRCC.S19_5 IL12_30-68_31.DDRCC.S20_5 IL12_30-68_31.DDRCC.S21_5 IL12_30-68_31.DDRCC.S22_5 IL12_30-68_31.DDRCC.S23_5 IL12_30-68_31.DDRCC.S24_5 IL12_30-68_31.DDRCC.S25_5 IL12_30-68_31.DDRCC.S26_5 IL12_30-68_31.DDRCC.S27_5 IL12_30-68_31.DDRCC.S28_5 IL12_30-68_31.DDRCC.S29_5 IL12_30-68_31.DDRCC.S30_5 IL12_30-68_31.DDRCC.S31_5 IL12_30-68_31.DDRCC.S32_5 IL12_30-68_31.DDRCC.S33_5 IL12_30-68_31.DDRCC.S34_5 IL12_30-68_31.DDRCC.S35_5 IL12_30-68_31.DDRCC.S36_5 IL12_30-68_31.DDRCC.S37_5 IL12_30-68_31.DDRCC.S38_5 IL12_30-68_31.DDRCC.S39_5 IL12_30-68_31.DDRCC.S40_5 IL12_30-68_31.DDRCC.S41_5 IL12_30-68_31.DDRCC.S42_5 IL12_30-68_31.DDRCC.S43_5 IL12_30-68_31.DDRCC.S44_5 IL12_30-68_31.DDRCC.S45_5 IL12_30-68_31.DDRCC.S46_5 IL12_30-68_31.SDRCC.GPIO8.D0_5 IL12_30-68_31.SDRCC.GPIO8.D1_5 IL12_30-68_31.SDRCC.GPIO8.D2_5 IL12_30-68_31.SDRCC.GPIO8.D3_5 IL12_30-68_31.SDRCC.GPIO8.D4_5 IL12_30-68_31.SDRCC.GPIO8.D5_5 IL12_30-68_31.SDRCC.GPIO8.D6_5 IL12_30-68_31.SDRCC.GPIO8.D7_5 IL12_30-68_31.SDRCC.GPIO15.D01C_5_N IL12_30-68_31.SDRCC.GPIO15.D01C_5_P IL12_30-68_31.SDRCC.GPIO15.D2_5 IL12_30-68_31.SDRCC.GPIO15.D3_5 IL12_30-68_31.SDRCC.GPIO15.D4_5 IL12_30-68_31.SDRCC.GPIO15.D5_5 IL12_30-68_31.SDRCC.GPIO15.D6_5 IL12_30-68_31.SDRCC.GPIO15.D7_5 IL12_30-68_31.SDRCC.GPIO15.D8_5 IL12_30-68_31.SDRCC.GPIO15.D9_5 IL12_30-68_31.SDRCC.GPIO15.D10_5 IL12_30-68_31.SDRCC.GPIO15.D11_5 IL12_30-68_31.SDRCC.GPIO15.D12_5 IL12_30-68_31.SDRCC.GPIO15.D13_5 IL12_30-68_31.SDRCC.GPIO15.D14_5